# Altium PCB PCB1.PcbDoc (part 1 of 2)
Units mil, origin at the board's own origin, x right, y up, seen from the top; angles counter-clockwise.
Board outline 8130 x 4940 mil, 6 copper layers (Top Layer, TOP_GND, +5V, -5V, BOT_GND, Bottom Layer), stack 32.112 mil thick; 163 components, 155 nets, 814 pads, 428 vias.
Unrouted connection lines stored in the file: 173.
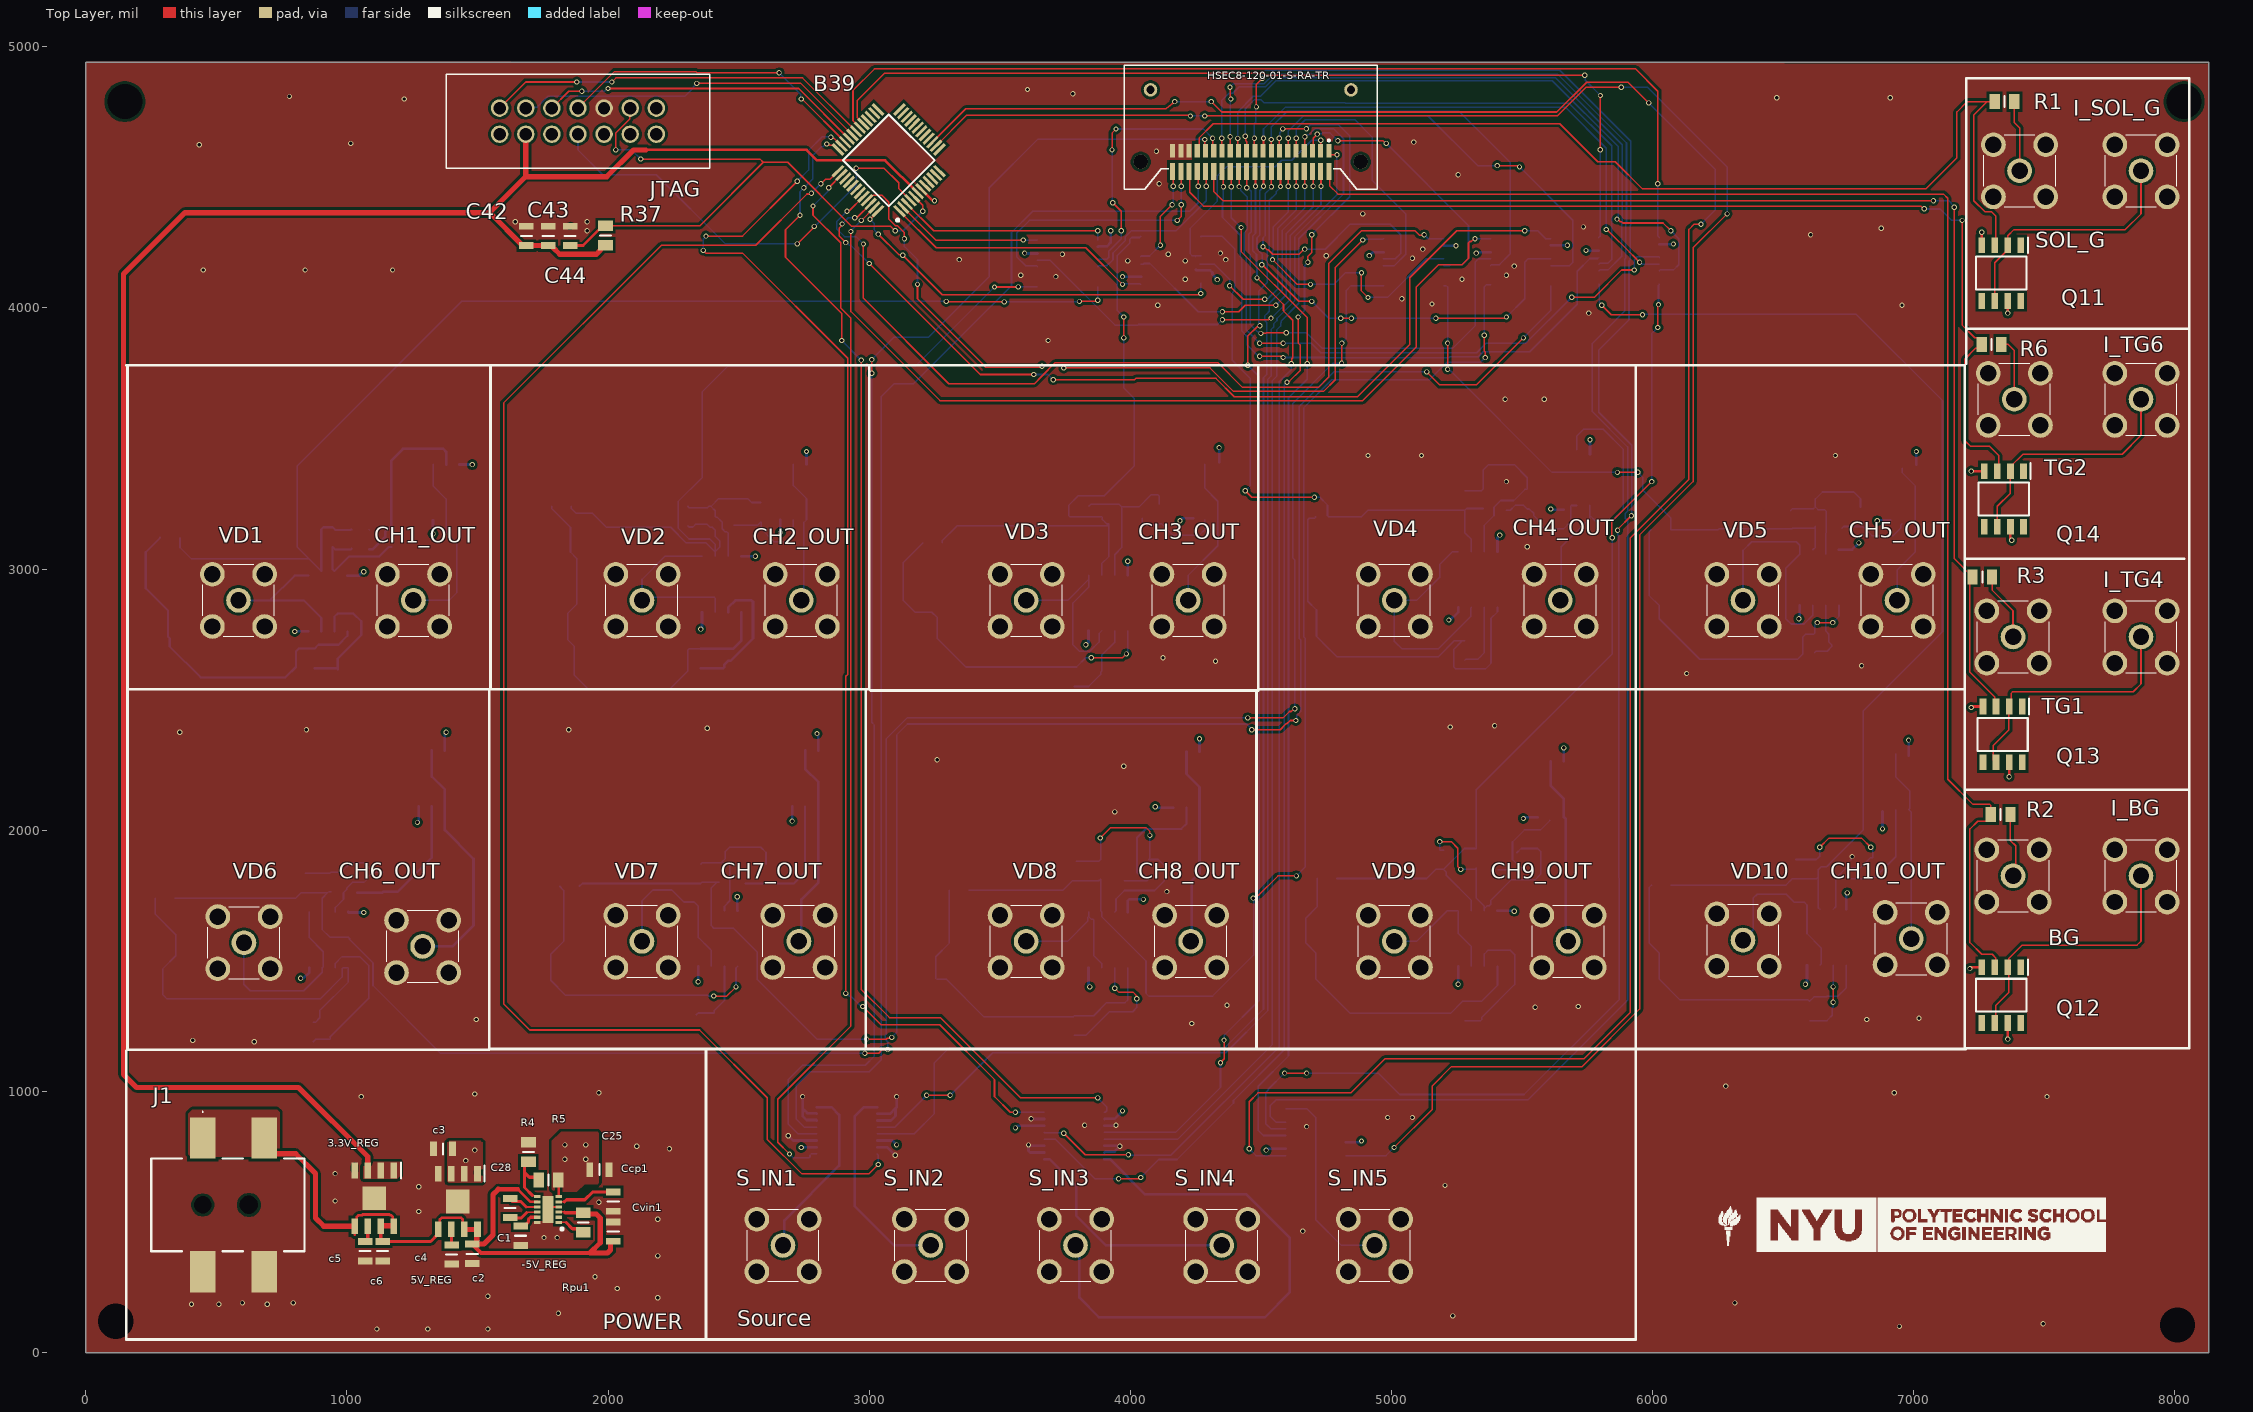
[diagram p0: Top Layer view]
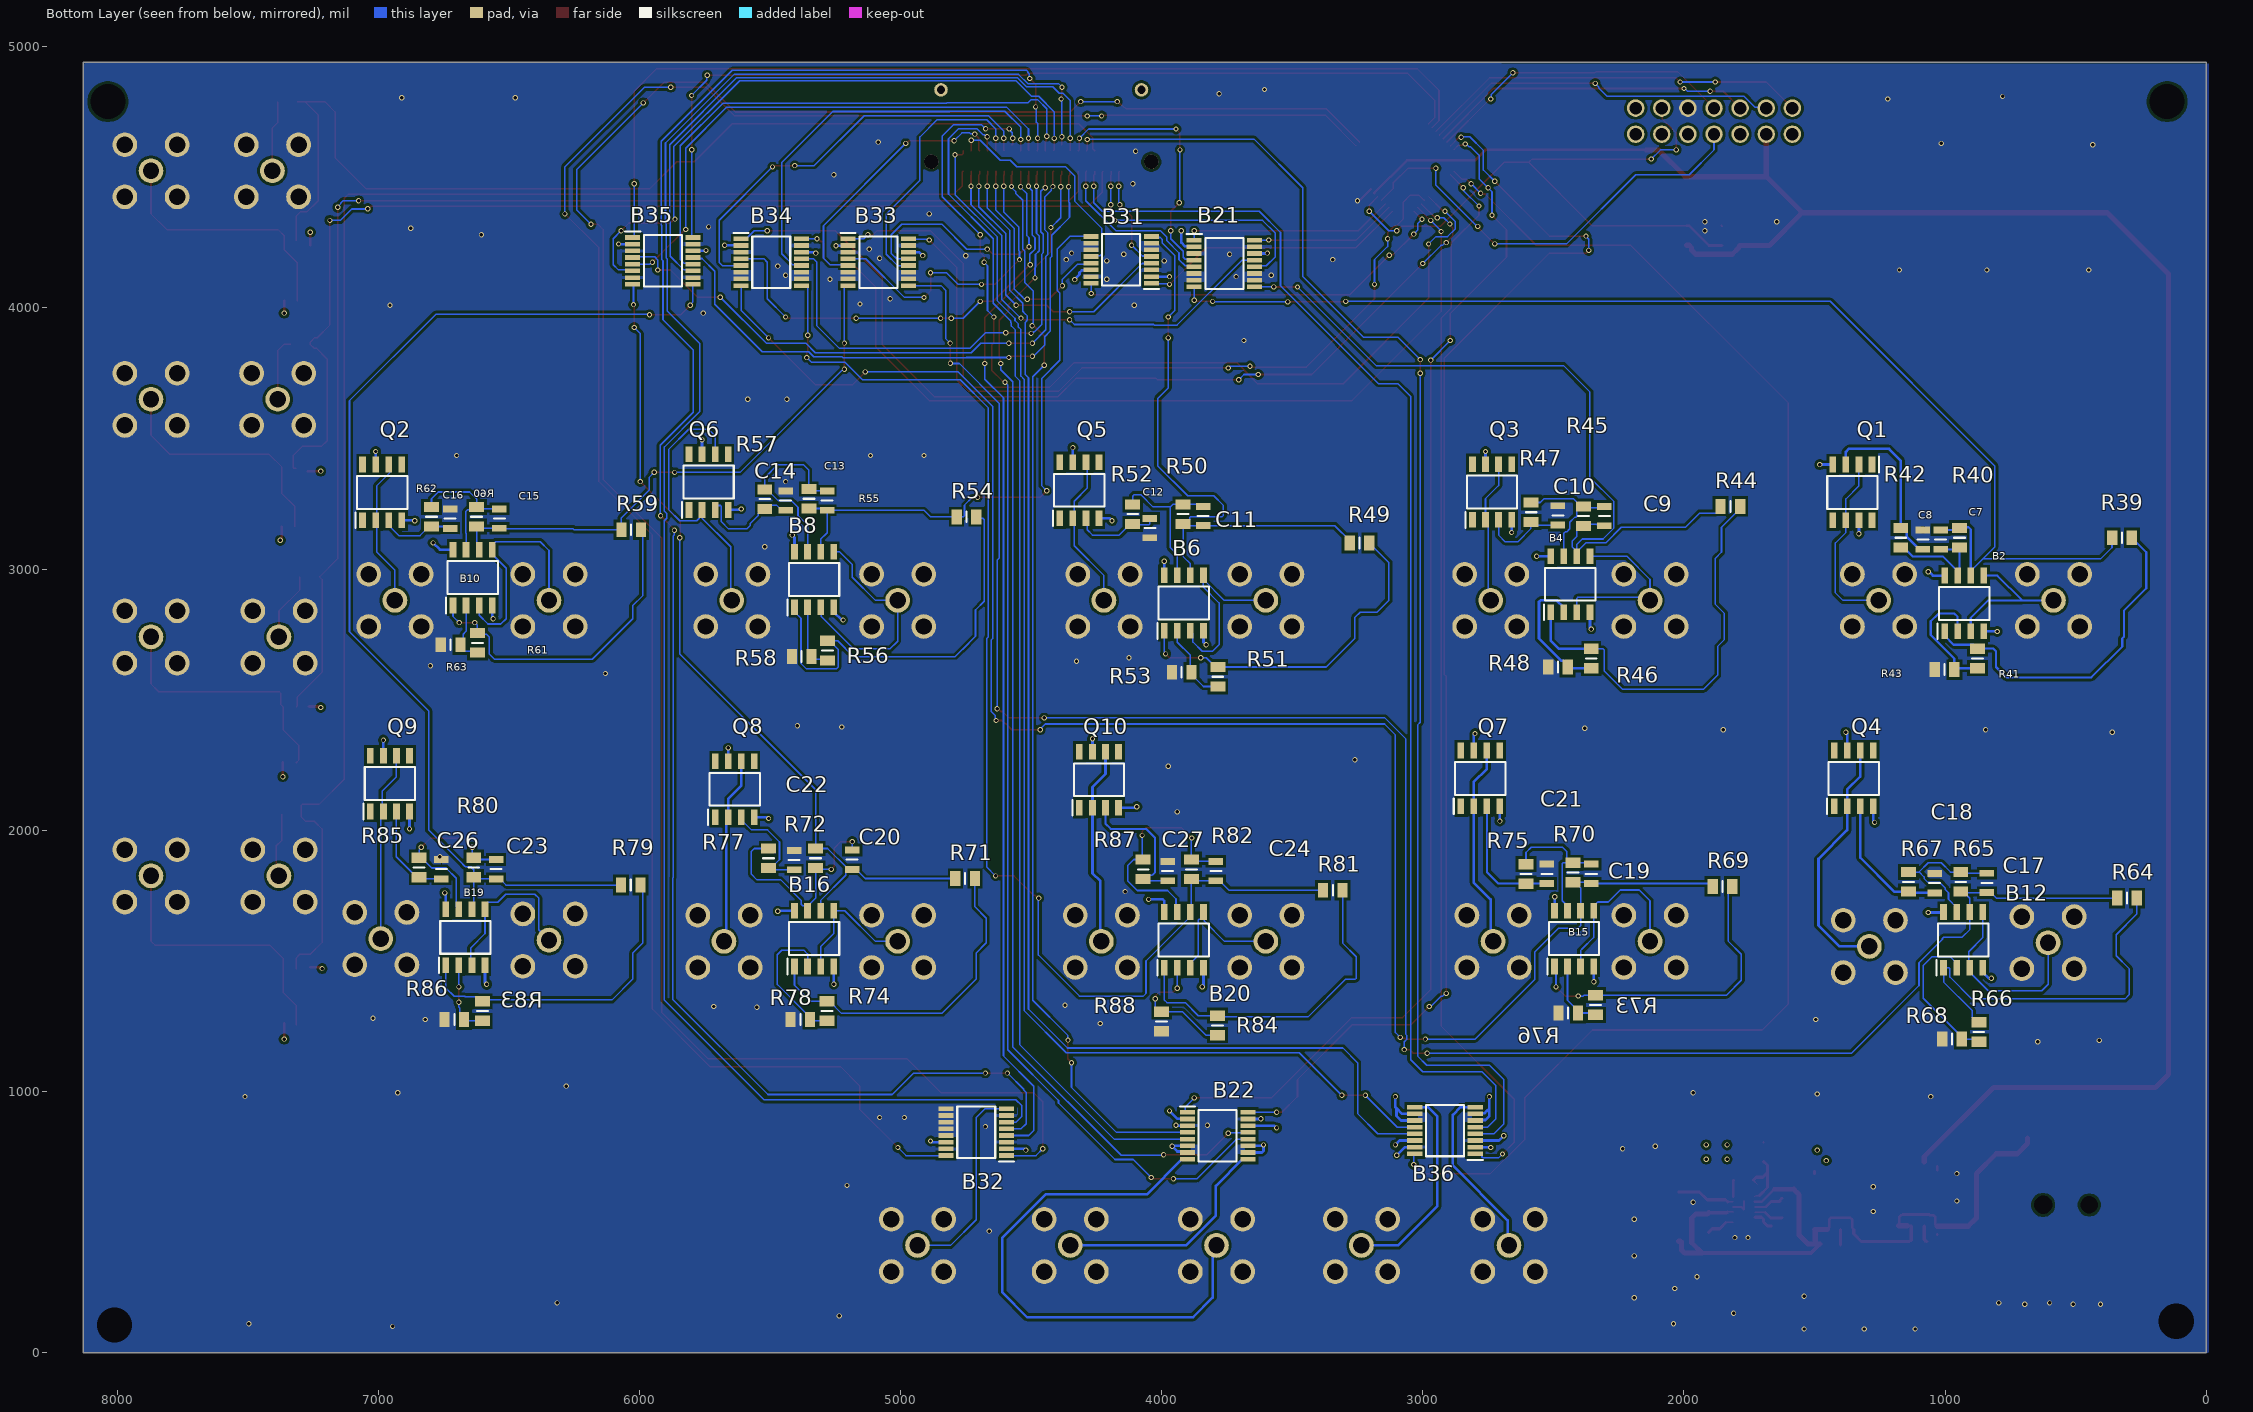
[diagram p1: Bottom Layer view, seen from below]
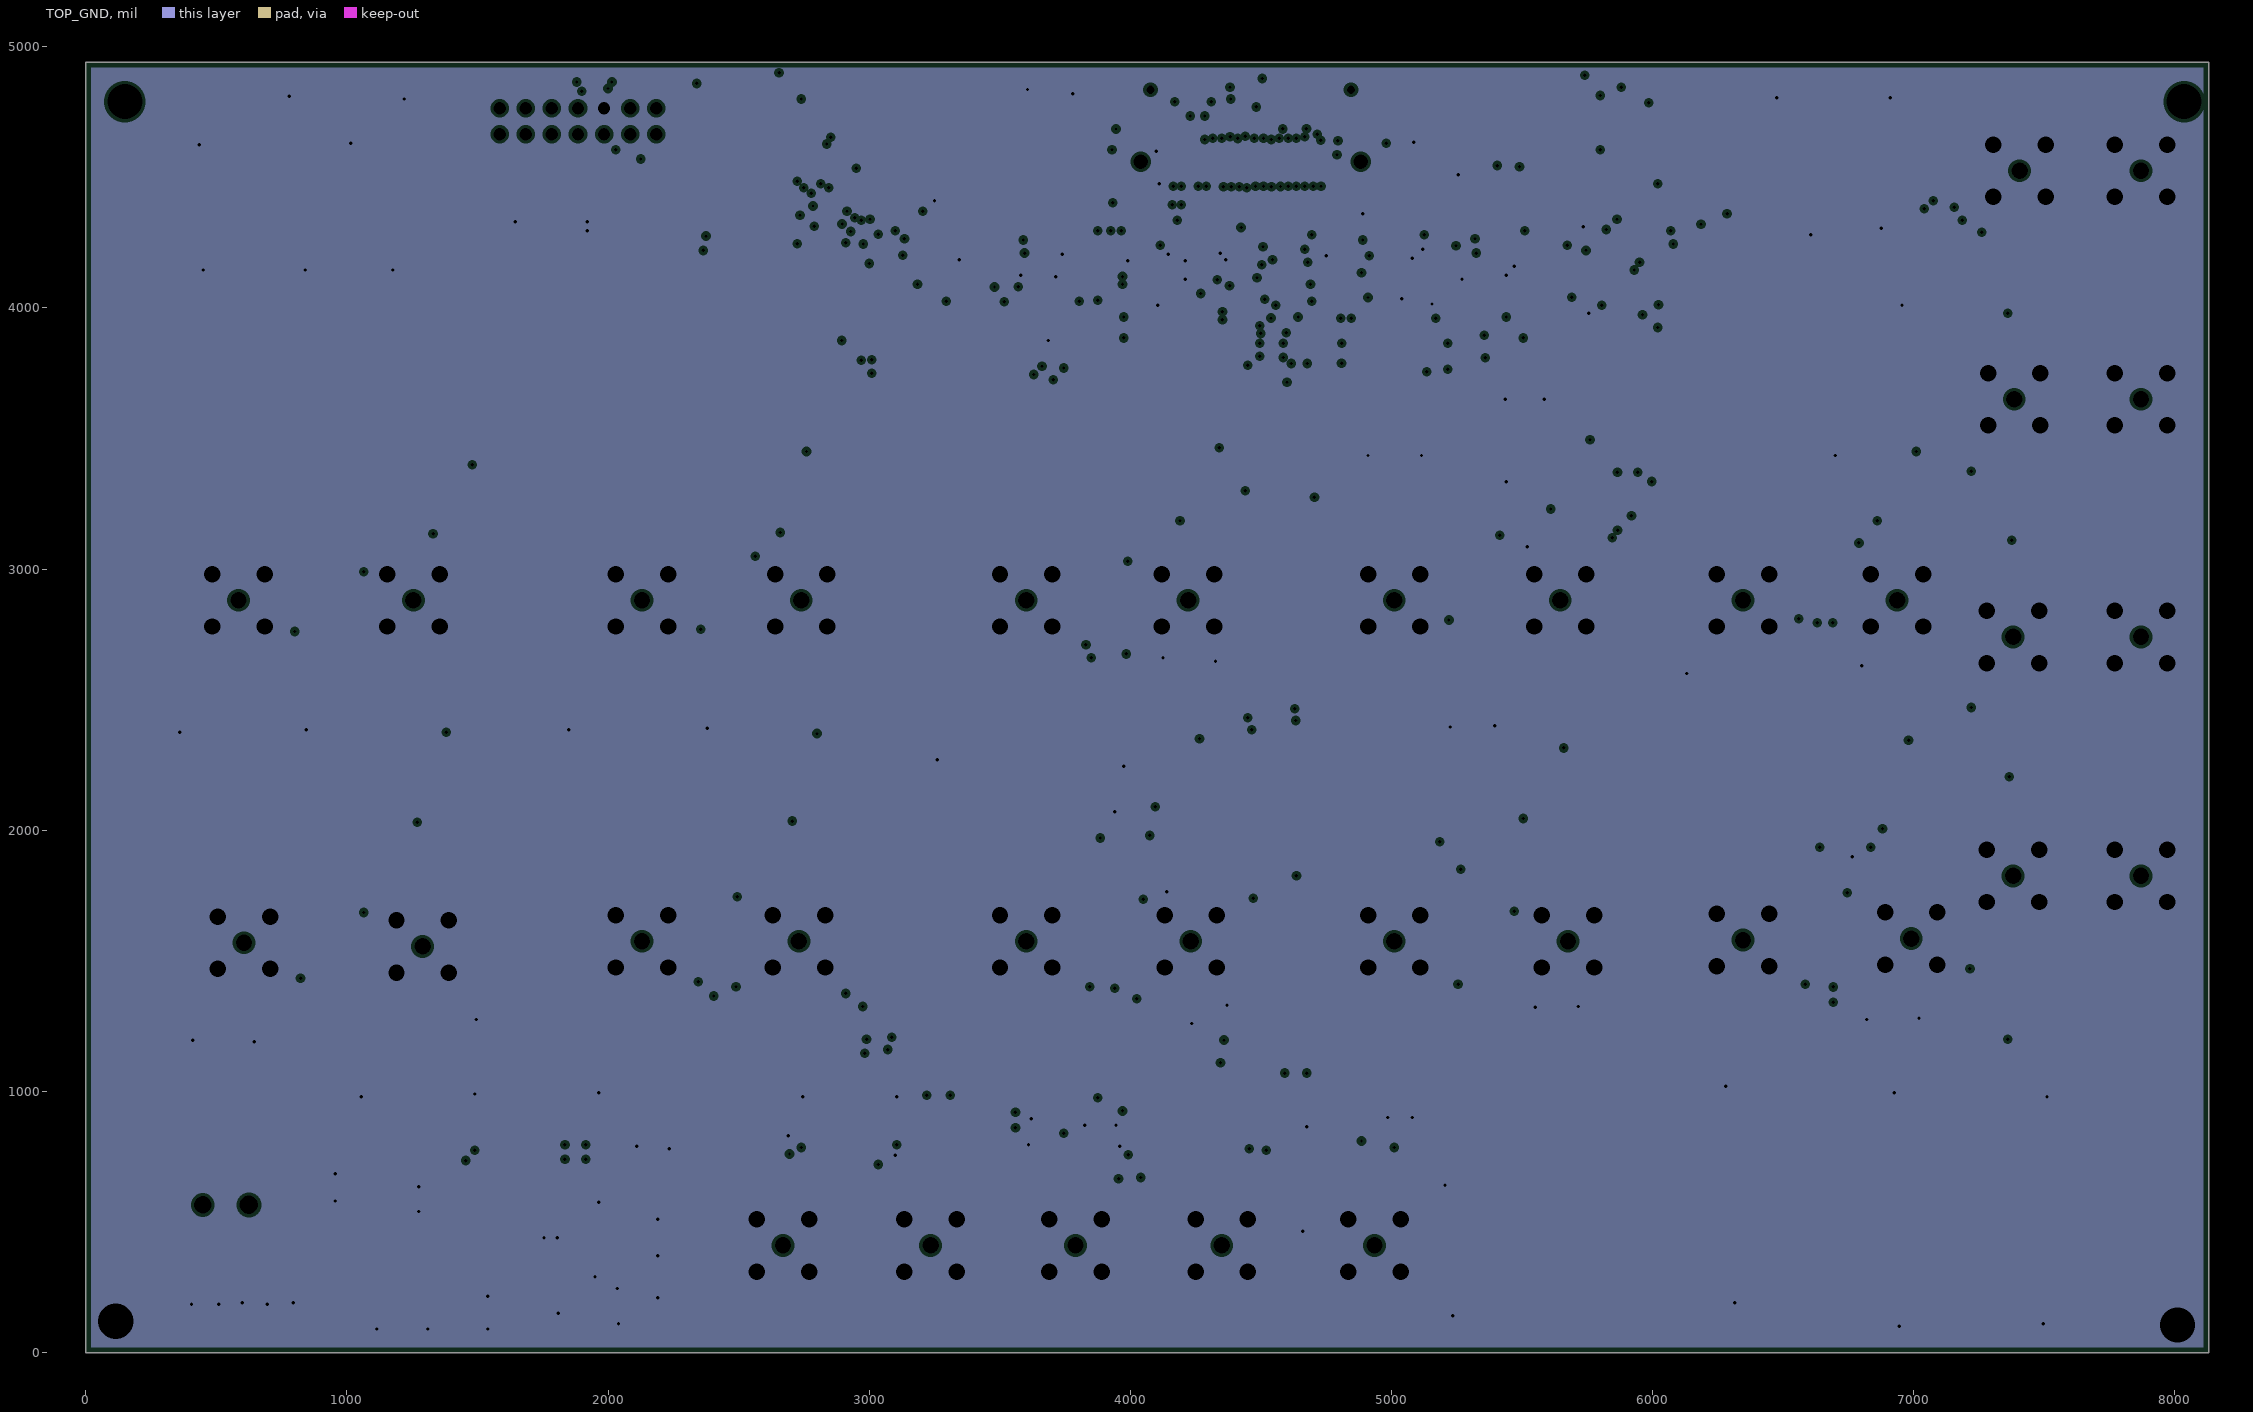
[diagram p2: TOP_GND, clearances drawn from the general rule]
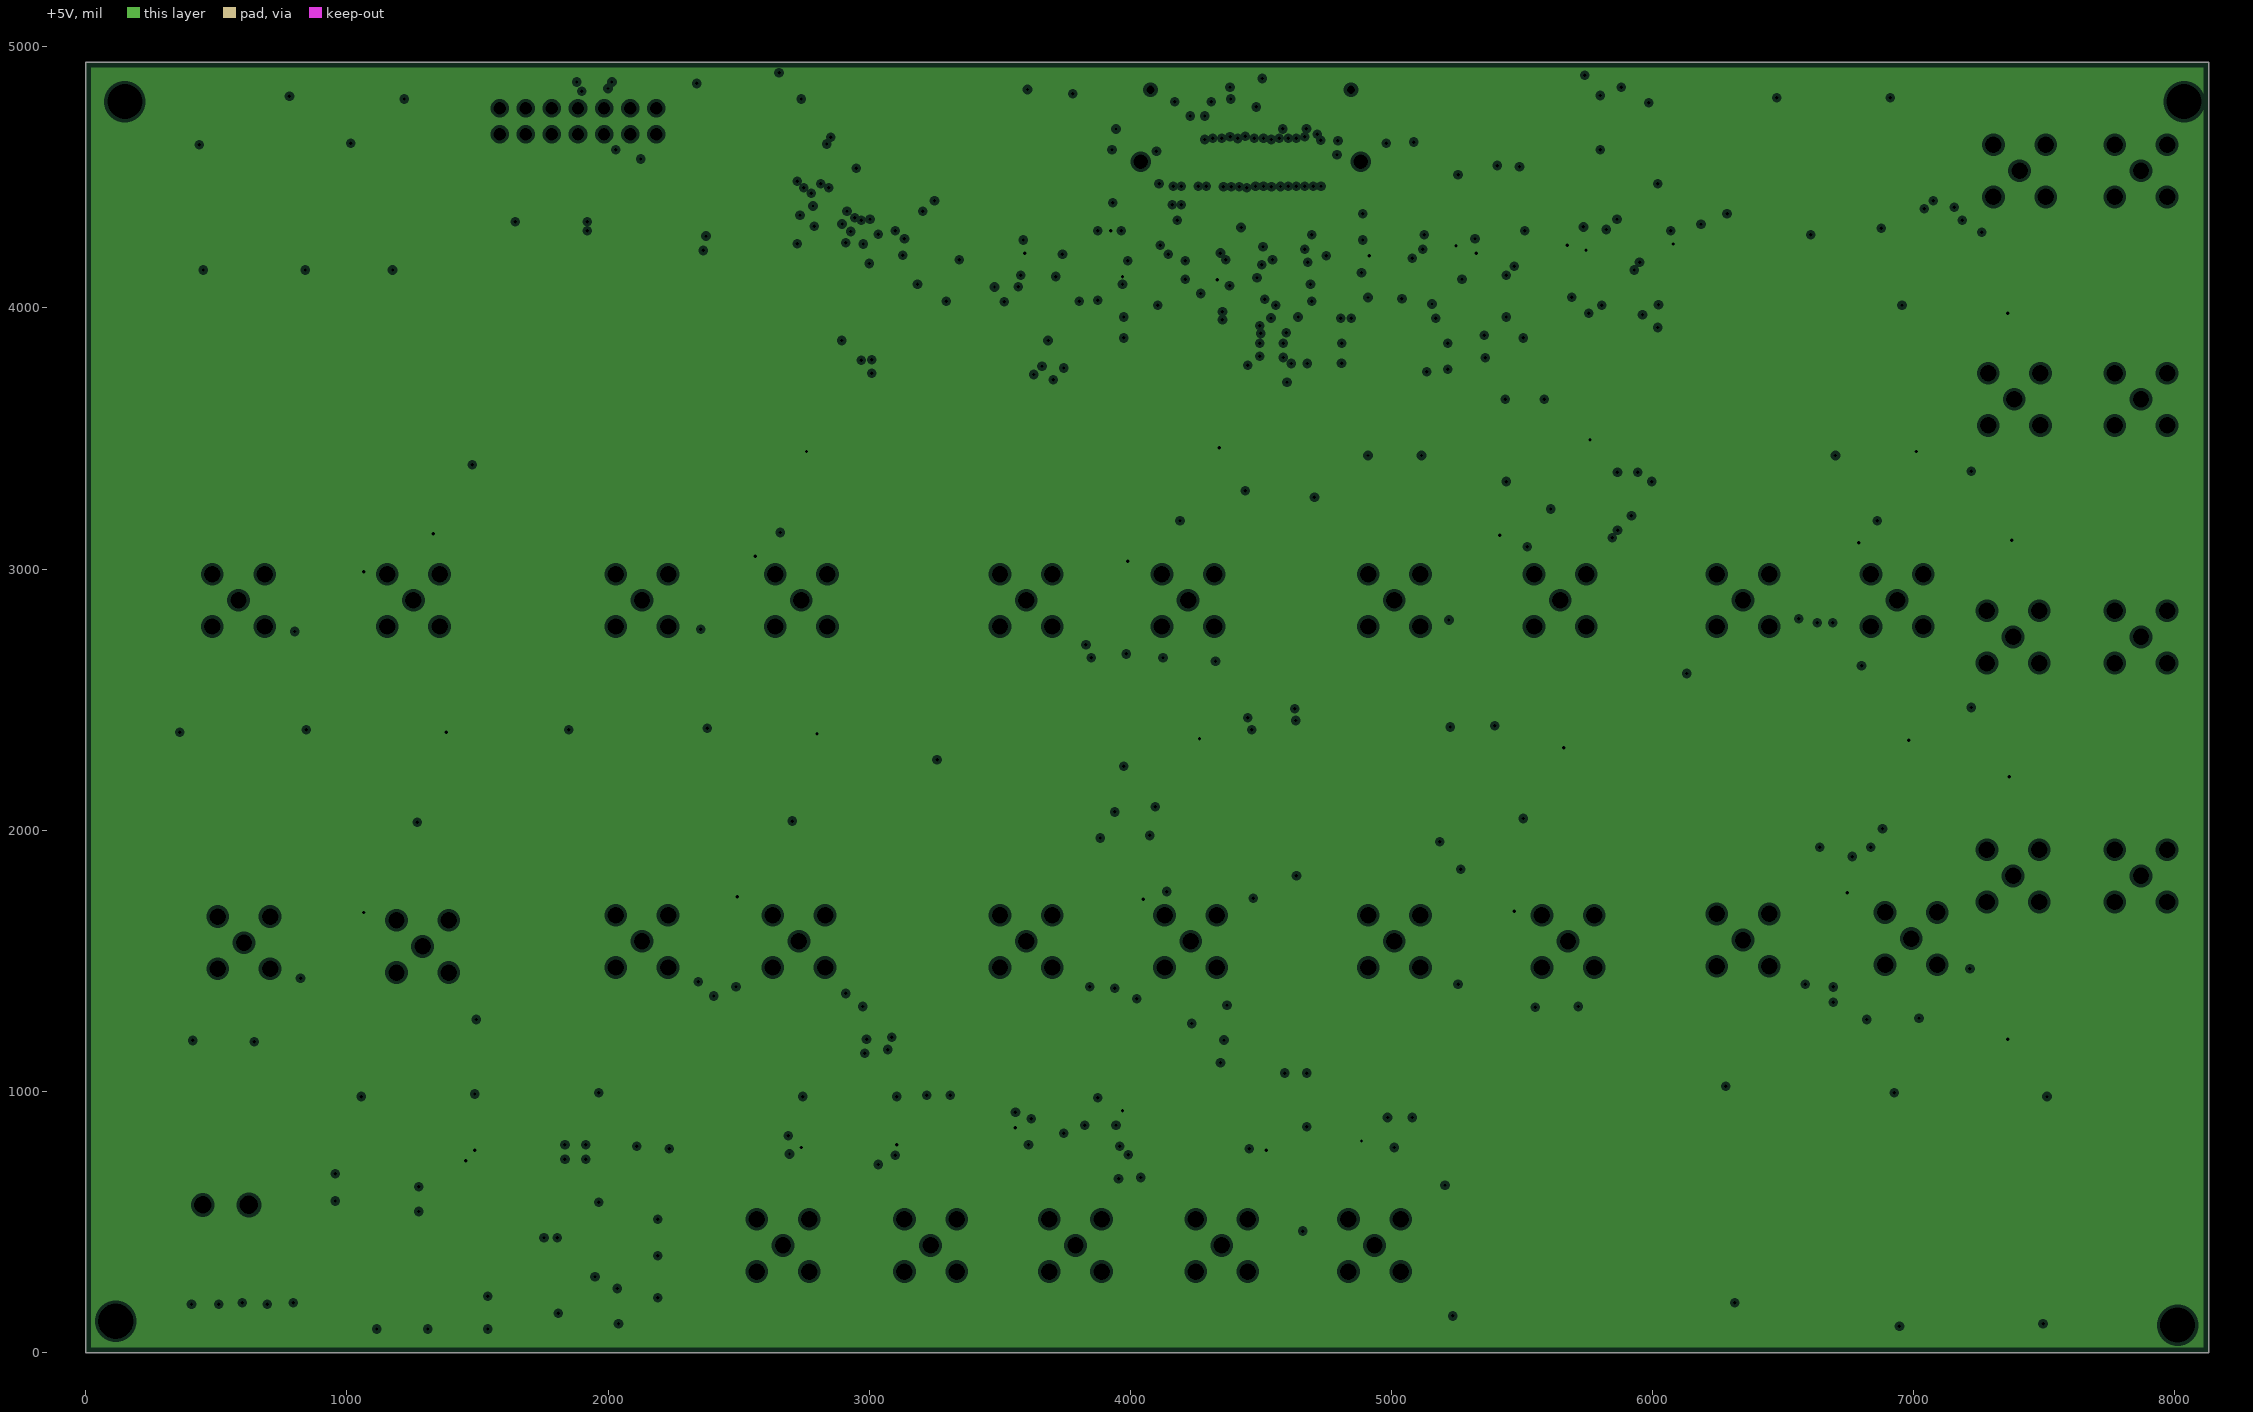
[diagram p3: +5V, clearances drawn from the general rule]
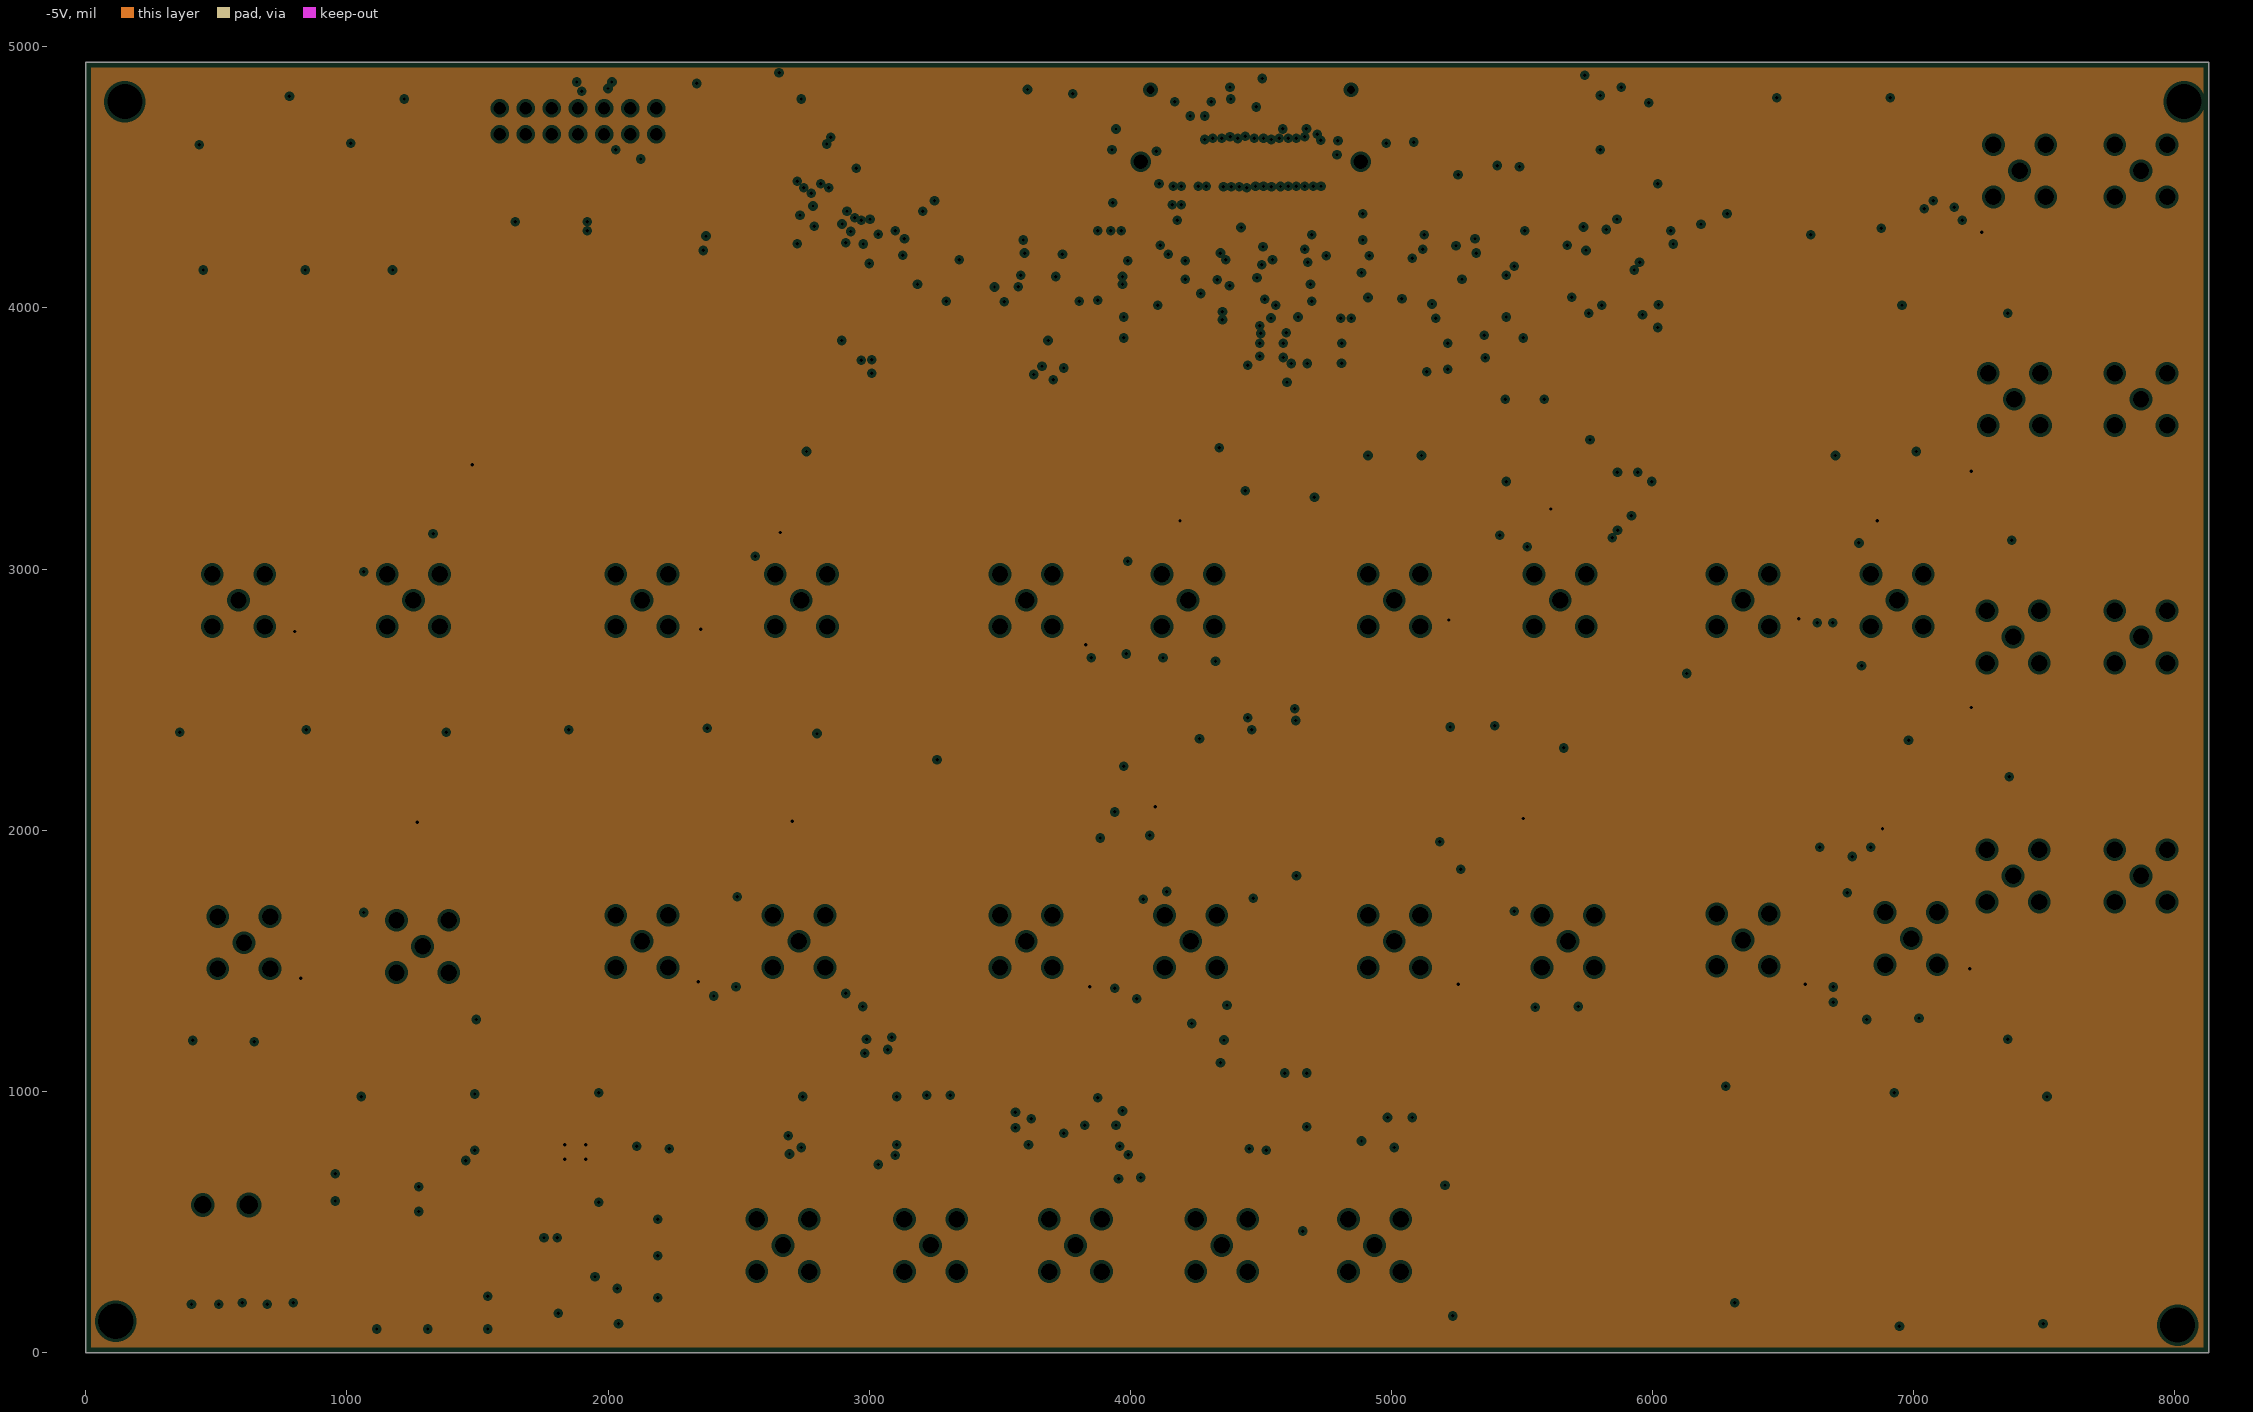
[diagram p4: -5V, clearances drawn from the general rule]
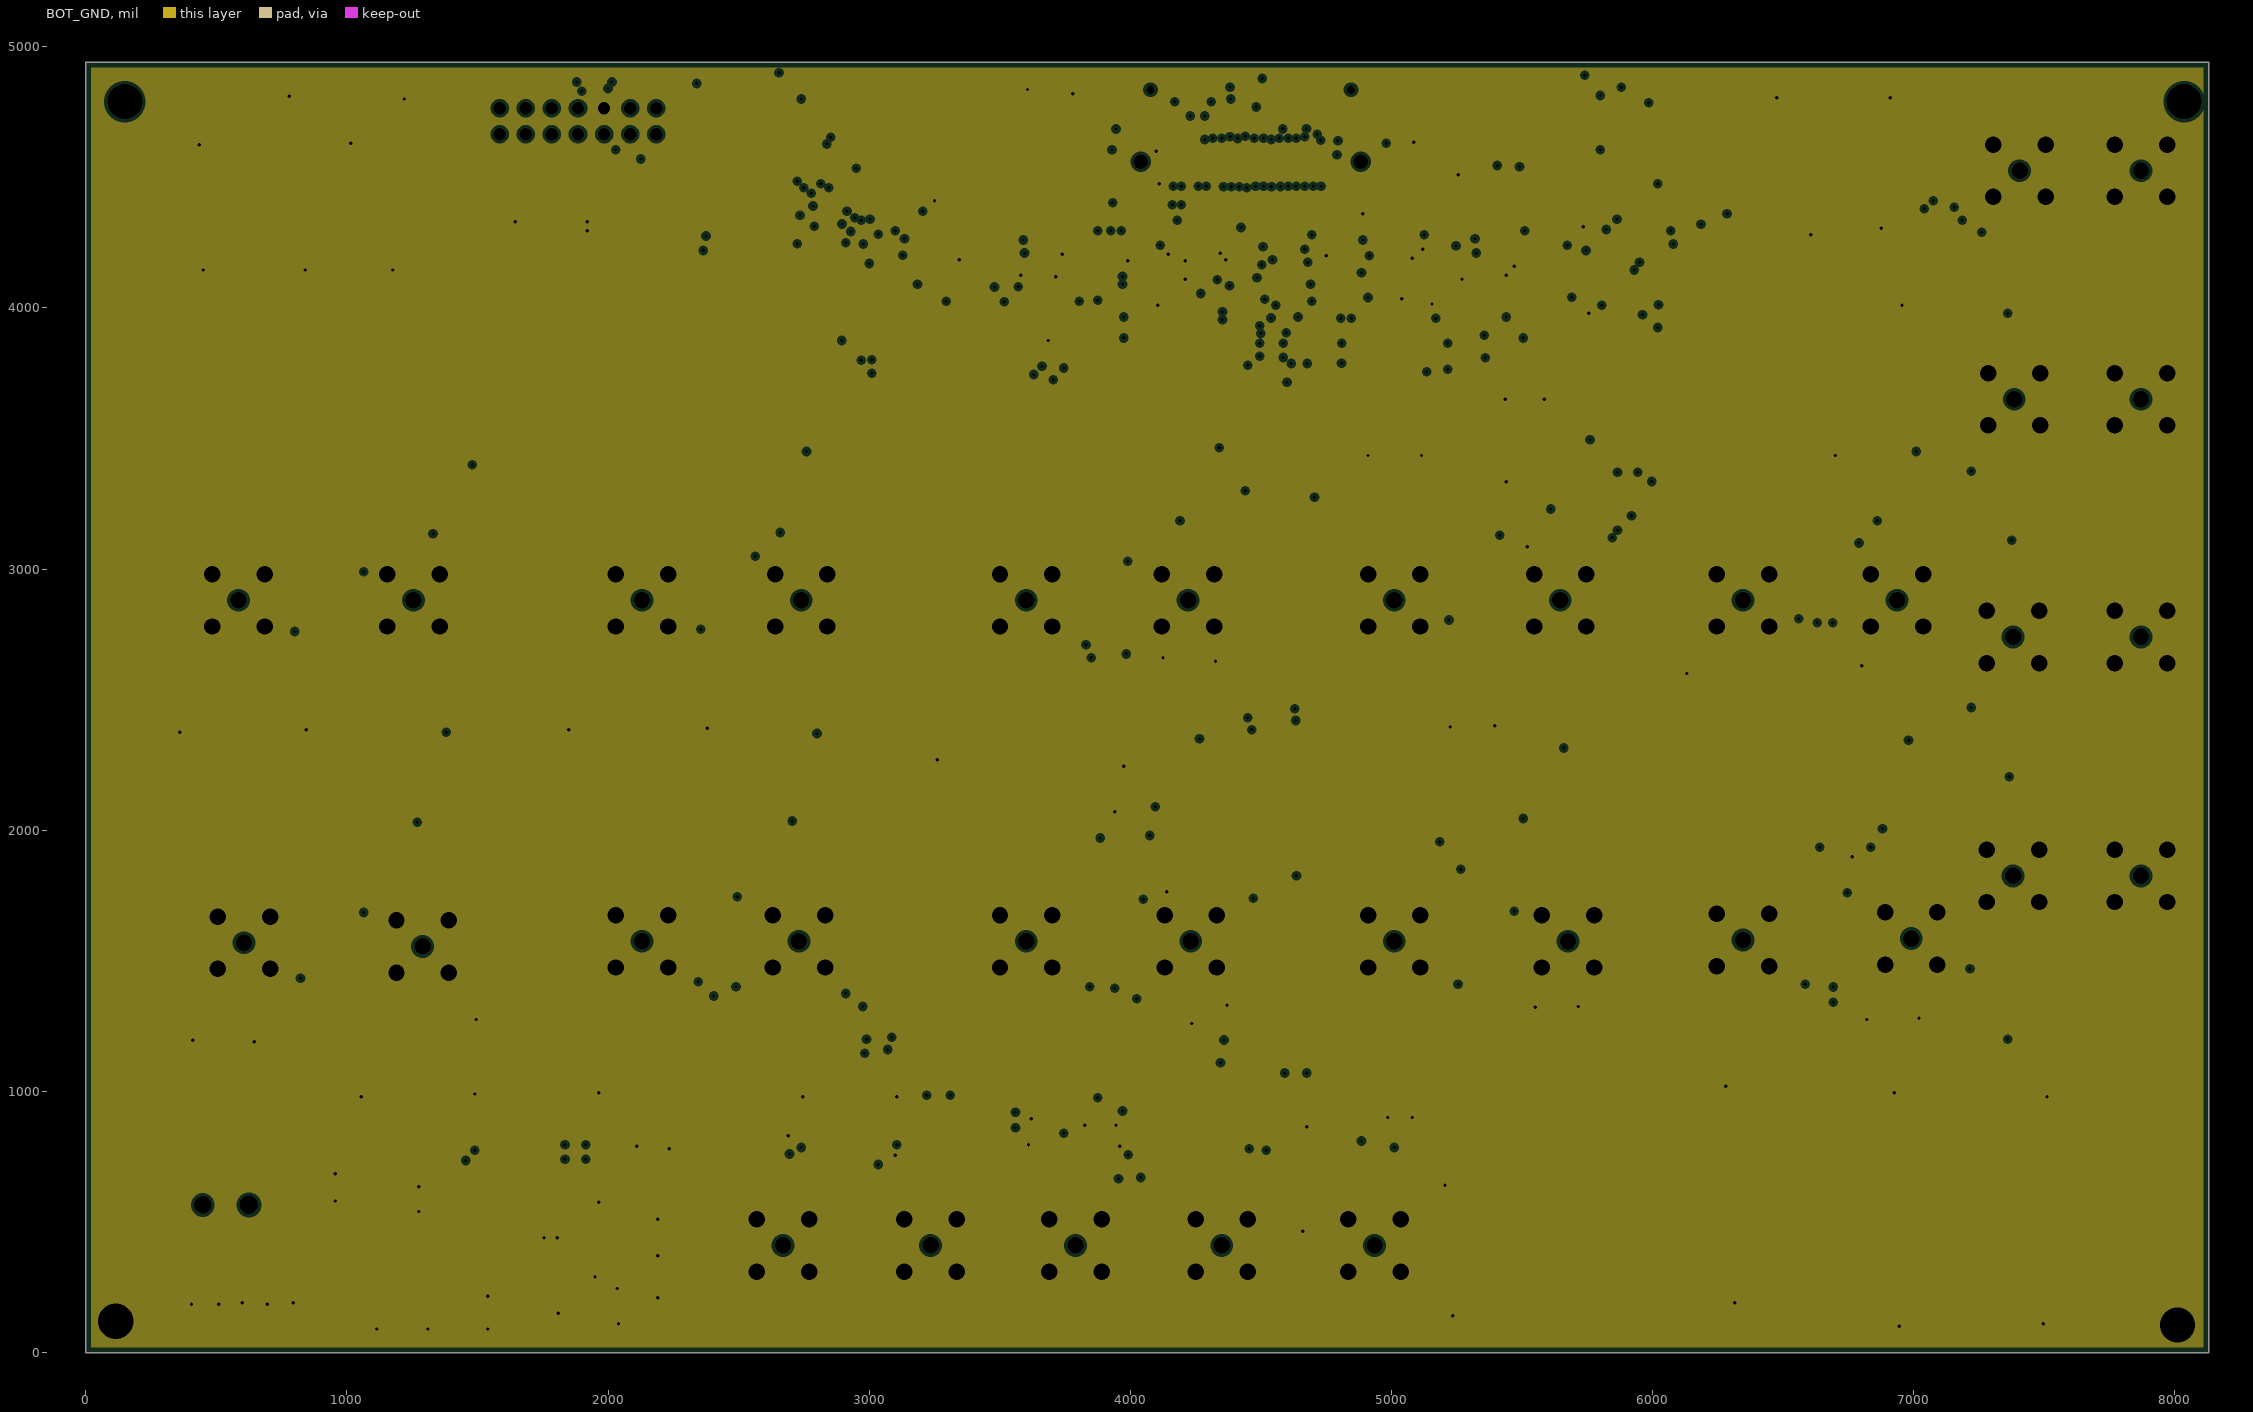
[diagram p5: BOT_GND, clearances drawn from the general rule]

## Layer stack, top to bottom
Top Solder: solder mask 0.4, Solder Resist, Dk 3.5
Top Layer: signal copper 1.4
Dielectric 4: prepreg 2.8, PP-006, Dk 4.1
TOP_GND: plane copper 1.378, net GND
Dielectric 2: prepreg 2.8, PP-006, Dk 4.1
+5V: plane copper 1.378, net +5
Dielectric 1: dielectric 12.6, FR-4, Dk 4.8
-5V: plane copper 1.378, net -5
Dielectric 3: prepreg 2.8, PP-006, Dk 4.1
BOT_GND: plane copper 1.378, net GND
Dielectric 5: prepreg 2.8, PP-006, Dk 4.1
Bottom Layer: signal copper 1.4
Bottom Solder: solder mask 0.4, Solder Resist, Dk 3.5

## Board outline
0,0 8130,0 8130,4940 0,4940

## Design rules (kind name [scope] priority, off if disabled: settings)
Clearance [All] p1: gap=10 ignorepadtopadclearanceinfootprint=TRUE except(6: Arc-Arc Arc-Track Arc-SMDPad Arc-THPad Arc-Via Arc-Text Track-Track Track-SMDPad Track-THPad Track-Via Track-Text SMDPad-SMDPad SMDPad-THPad SMDPad-Via SMDPad-Text THPad-Via THPad-Text Via-Via Via-Text Fill-Text Poly-Text Region-Text Text-Text)
HoleSize [All] p1: absolutevalues=TRUE maxlimit=200 minlimit=1 maxpercent=80.000 minpercent=20.000
MinimumSolderMaskSliver MinimumSolderMaskSliver_1 [All] p1 off: minsoldermaskwidth=2
PlaneClearance [All] p1: clearance=12
PlaneConnect [All] p1: planeconnectstyle=Relief reliefexpansion=20 reliefentries=4 reliefconductorwidth=10 reliefairgap=10
PolygonConnect [All] p1: connectstyle=Direct reliefconductorwidth=10 reliefentries=4 polygonreliefangle="90 Angle" airgapwidth=10
RoutingVias [All] p1: holewidth=10 width=20 viastyle="Through Hole" minholewidth=8 minwidth=10 maxholewidth=28 maxwidth=50
SilkToSilkClearance [All] p1: silktosilkclearance=6
SilkToSolderMaskClearance [IsPad] p1: minsilkscreentomaskgap=3 clearancetoexposedcopper=TRUE
SolderMaskExpansion [All] p1: expansion=2.5 istentingtop=FALSE useseparateexpansions=TRUE expansionbottom=2.5 istentingbottom=FALSE
Width [All] p1: maxlimit=40 minlimit=6 preferedwidth=8
24 further rules are at their usual default settings.

## Classes and differential pairs
component class MCU: B39 C42 C43 C44 R37
component class gate: BG I_BG I_SOL_G I_TG4 R1 R2 R3 TG1
component class Amplify: B2 B4 B6 B8 B10 B12 C7 C8 C9 C10 C11 C12 C13 C14 C15 C16 C17 C18 R39 R40 R41 R42 R43 R44 R45 R46 R47 R48 R49 R50 R51 R52 R53 R54 R55 R56 R57 R58 R59 R60 R61 R62 R63 R64 R65 R66 R67 R68 VD5 VD6 VD7 VD8 VD9 VD10
component class Amplify2: B15 B16 B19 B20 C19 C20 C21 C22 C23 C24 C26 C27 R69 R70 R71 R72 R73 R74 R75 R76 R77 R78 R79 R80 R81 R82 R83 R84 R85 R86 R87 R88
component class read_out: 3.3V_REG 5V_REG -5V_REG B21 B22 B31 B32 B33 B34 B35 B36 C1 c2 c3 c4 c5 c6 C25 Ccp1 CH1_OUT CH2_OUT CH3_OUT CH4_OUT CH6_OUT CH8_OUT CH9_OUT CH10_OUT Cvin1 HSEC8-120-01-S-RA-TR J1 R4 R5 Rpu1 S_IN1 S_IN2 S_IN3 S_IN4 S_IN5

## Components (designator, comment, footprint, x,y, rotation, side; value= is the part's Value field where it differs from the comment)
3.3V_REG "ADP7118ARDZ-3.3-R7" ADP7118ARDZ-5.0-R7 1560,775 r270 top
5V_REG "ADP7118ARDZ-5.0-R7" ADP7118ARDZ-5.0-R7 1880,763.23 r270 top
-5V_REG "LM27762" LM27762 1780,502.5 r180 top
B2 "ADA4610-2ARZ-R7" SOIC127P600X175-8N 926.95,2868.23 r90 bottom
B4 "ADA4610-2ARZ-R7" SOIC127P600X175-8N 2435,2941.77 r90 bottom
B6 "ADA4610-2ARZ-R7" SOIC127P600X175-8N 3915,2870 r90 bottom
B8 "ADA4610-2ARZ-R7" SOIC127P600X175-8N 5331,2960 r90 bottom
B10 "ADA4610-2ARZ-R7" SOIC127P600X175-8N 6638.5,2967.31 r90 bottom
B12 "ADA4610-2ARZ-R7" SOIC127P600X175-8N 931,1580 r90 bottom
B15 "ADA4610-2ARZ-R7" SOIC127P600X175-8N 2421,1585 r90 bottom
B16 "ADA4610-2ARZ-R7" SOIC127P600X175-8N 5331,1585 r90 bottom
B19 "ADA4610-2ARZ-R7" SOIC127P600X175-8N 6666,1590 r90 bottom
B20 "ADA4610-2ARZ-R7" SOIC127P600X175-8N 3915,1580 r90 bottom
B21 "TMUX1109PWR" TMUX1109PWR 3770,4125 r180 bottom
B22 "TMUX1109PWR" TMUX1109PWR 3795.54,785 r180 bottom
B31 "TMUX1109PWR" TMUX1109PWR 4145,4228.78 r0 bottom
B32 "TMUX1109PWR" TMUX1109PWR 4700,888.78 r0 bottom
B33 "TMUX1109PWR" TMUX1109PWR 5095,4130 r180 bottom
B34 "TMUX1109PWR" TMUX1109PWR 5505,4130 r180 bottom
B35 "TMUX1109PWR" TMUX1109PWR 5920,4135 r180 bottom
B36 "TMUX1109PWR" TMUX1109PWR 2905,895 r0 bottom
B39 "MSP430FR2355TPT" QFP50P900X900X160-48N 3075,4565 r135 top
BG "SMA-J-P-H-ST-TH1" SMAJPHSTTH1 7380,1825 r0 top
C1 "1u" 0805X7R106KT1AT -1820.34,-12646.55 r270 top
c2 "2.2u" 0805X7R106KT1AT 4925,13577.99 r90 top
c3 "2.2u" 0805X7R106KT1AT 14567.99,-2665 r0 top
c4 "2.2u" 0805X7R106KT1AT 4845.95,13575.4 r90 top
c5 "2.2u" 0805X7R106KT1AT 4515,13587.99 r90 top
c6 "2.2u" 0805X7R106KT1AT 4581.5,13587.99 r90 top
C7 "10p" 0805X7R106KT1AT 4462.6,-10087.01 r270 bottom
C8 "80n" 0805X7R106KT1AT -2360,16312.99 r90 bottom
C9 "10p" 0805X7R106KT1AT -1140,16402.99 r90 bottom
C10 "80n" 0805X7R106KT1AT -962.52,16405.51 r90 bottom
C11 "10p" 0805X7R106KT1AT 396,16403.23 r90 bottom
C12 "80n" 0805X7R106KT1AT 7490,-10042.99 r270 bottom
C13 "10p" 0805X7R106KT1AT 1836,16462.26 r90 bottom
C14 "80n" 0805X7R106KT1AT 1995,16462.01 r90 bottom
C15 "10p" 0805X7R106KT1AT 3091,16393.41 r90 bottom
C16 "80n" 0805X7R106KT1AT 3280,16392.99 r90 bottom
C17 "10p" 0805X7R106KT1AT -2605,14997.99 r90 bottom
C18 "80n" 0805X7R106KT1AT -2405,14997.01 r90 bottom
C19 "10p" 0805X7R106KT1AT -1090,15032.99 r90 bottom
C20 "10p" 0805X7R106KT1AT 1740,15087.01 r90 bottom
C21 "80n" 0805X7R106KT1AT -920,15032.99 r90 bottom
C22 "80n" 0805X7R106KT1AT 1962.81,15085.71 r90 bottom
C23 "10p" 0805X7R106KT1AT 3103.91,15050.71 r90 bottom
C24 "10p" 0805X7R106KT1AT 347.76,15043.41 r90 bottom
C25 "2.2u" 0805X7R106KT1AT 15167.01,-2745 r0 top
C26 "80n" 0805X7R106KT1AT 3313.14,15050.71 r90 bottom
C27 "80n" 0805X7R106KT1AT 532.56,15043.41 r90 bottom
C28 "1u" 0805X7R106KT1AT 5110,13647.01 r90 top
C42 "100n" 0805X7R106KT1AT 5132.53,17475.8 r90 top
C43 "10u" 0805X7R106KT1AT 5216.04,17475.8 r90 top
C44 "1n" 0805X7R106KT1AT 5299.55,17475.8 r90 top
Ccp1 "4.7uf" 0805X7R106KT1AT 5465,13777.99 r90 top
CH1_OUT "SMA-J-P-H-ST-TH1" SMAJPHSTTH1 1255,2880 r0 top
CH2_OUT "SMA-J-P-H-ST-TH1" SMAJPHSTTH1 2740,2880 r0 top
CH3_OUT "SMA-J-P-H-ST-TH1" SMAJPHSTTH1 4221,2880 r0 top
CH4_OUT "SMA-J-P-H-ST-TH1" SMAJPHSTTH1 5646,2880 r0 top
CH5_OUT "SMA-J-P-H-ST-TH1" SMAJPHSTTH1 6936,2880 r90 top
CH6_OUT "SMA-J-P-H-ST-TH1" SMAJPHSTTH1 1290,1555 r0 top
CH7_OUT "SMA-J-P-H-ST-TH1" SMAJPHSTTH1 2731,1574.29 r0 top
CH8_OUT "SMA-J-P-H-ST-TH1" SMAJPHSTTH1 4231,1574.29 r0 top
CH9_OUT "SMA-J-P-H-ST-TH1" SMAJPHSTTH1 5676,1574.29 r0 top
CH10_OUT "SMA-J-P-H-ST-TH1" SMAJPHSTTH1 6990,1585 r0 top
Cvin1 "2.2u" 0805X7R106KT1AT -1425,-12737.01 r270 top
HSEC8-120-01-S-RA-TR "HSEC8-120-01-S-RA-TR" SAMTEC_HSEC8-120-01-L-RA 4461.14,4562.36 r180 top
I_BG "SMA-J-P-H-ST-TH1" SMAJPHSTTH1 7870,1825 r0 top
I_SOL_G "SMA-J-P-H-ST-TH1" SMAJPHSTTH1 7870,4525 r0 top
I_TG4 "SMA-J-P-H-ST-TH1" SMAJPHSTTH1 7870,2740 r0 top
I_TG6 "SMA-J-P-H-ST-TH1" SMAJPHSTTH1 7870,3650 r0 top
J1 "PJ-002AH-SMT-TR" PWRPJ 589.29,485 r270 top
JTAG "302-S14" CONN_7024614xx_MOL 2185,4765 r180 top
Q1 "AD8510ARZ" AD8510ARZ 365,-2596.46 r270 bottom
Q2 "AD8510ARZ" AD8510ARZ 7975,9183.23 r90 bottom
Q3 "AD8510ARZ" AD8510ARZ 3725,9185 r90 bottom
Q4 "AD8510ARZ" AD8510ARZ 2340,8088.23 r90 bottom
Q5 "AD8510ARZ" AD8510ARZ 5305,9191.77 r90 bottom
Q6 "AD8510ARZ" AD8510ARZ 6725,9223.23 r90 bottom
Q7 "AD8510ARZ" AD8510ARZ 3770,8088.23 r90 bottom
Q8 "AD8510ARZ" AD8510ARZ 6625,8046.77 r90 bottom
Q9 "AD8510ARZ" AD8510ARZ 7945,8068.23 r90 bottom
Q10 "AD8510ARZ" AD8510ARZ 5230,8083.23 r90 bottom
Q11 "AD8510ARZ" AD8510ARZ 8325,-1756.77 r270 top
Q12 "AD8510ARZ" AD8510ARZ 8325,-4521.77 r270 top
Q13 "AD8510ARZ" AD8510ARZ 8330,-3523.23 r270 top
Q14 "AD8510ARZ" AD8510ARZ 8335,-2621.77 r270 top
R1 "100M" CR0805-FX-1543ELF 5287.4,6250 r180 top
R2 "100M" CR0805-FX-1543ELF 5272.6,3520 r180 top
R3 "100M" CR0805-FX-1543ELF 5202.4,4430 r180 top
R4 "100k" CR0805-FX-1543ELF 3155,2827.6 r90 top
R5 "309k" CR0805-FX-1543ELF 3832.4,-800 r0 top
R6 "100M" CR0805-FX-1543ELF 5237.6,5320 r180 top
R37 "47k" CR0805-FX-1543ELF 3450,6337.6 r90 top
R39 "110k" CR0805-FX-1543ELF 2382.6,4580 r0 bottom
R40 "110k" CR0805-FX-1543ELF 2405,1059.88 r270 bottom
R41 "110k" CR0805-FX-1543ELF -584.05,4717.6 r90 bottom
R42 "10k" CR0805-FX-1543ELF -290,5179.88 r90 bottom
R43 "110k" CR0805-FX-1543ELF -1057.6,1155 r180 bottom
R44 "110k" CR0805-FX-1543ELF 3882.4,4700 r0 bottom
R45 "110k" CR0805-FX-1543ELF 925,5262.4 r90 bottom
R46 "110k" CR0805-FX-1543ELF 895,4717.6 r90 bottom
R47 "10k" CR0805-FX-1543ELF 4045,1157.4 r270 bottom
R48 "110k" CR0805-FX-1543ELF 422.6,1165 r180 bottom
R49 "110k" CR0805-FX-1543ELF 5302.4,4560 r0 bottom
R50 "110k" CR0805-FX-1543ELF 2458.19,5270.12 r90 bottom
R51 "110k" CR0805-FX-1543ELF 2325,4647.6 r90 bottom
R52 "10k" CR0805-FX-1543ELF 5571,1150.12 r270 bottom
R53 "110k" CR0805-FX-1543ELF 1863.4,1145 r180 bottom
R54 "110k" CR0805-FX-1543ELF 6807.6,4660 r0 bottom
R55 "110k" CR0805-FX-1543ELF 3891,5329.15 r90 bottom
R56 "110k" CR0805-FX-1543ELF 3820,4747.6 r90 bottom
R57 "10k" CR0805-FX-1543ELF 6980,1207.4 r270 bottom
R58 "110k" CR0805-FX-1543ELF 3318.4,1205 r180 bottom
R59 "110k" CR0805-FX-1543ELF 8091.29,4610.32 r0 bottom
R60 "110k" CR0805-FX-1543ELF 5163.19,5260.3 r90 bottom
R61 "110k" CR0805-FX-1543ELF 5160,4777.6 r90 bottom
R62 "10k" CR0805-FX-1543ELF 8256,1140.3 r270 bottom
R63 "110k" CR0805-FX-1543ELF 4662.6,1250 r180 bottom
R64 "110k" CR0805-FX-1543ELF 2363.6,3200 r0 bottom
R65 "110k" CR0805-FX-1543ELF -520,3862.4 r90 bottom
R66 "110k" CR0805-FX-1543ELF -589,3287.6 r90 bottom
R67 "10k" CR0805-FX-1543ELF 2600,-257.6 r270 bottom
R68 "110k" CR0805-FX-1543ELF -1086.4,-260 r180 bottom
R69 "110k" CR0805-FX-1543ELF 3912.6,3245 r0 bottom
R70 "110k" CR0805-FX-1543ELF 965,3897.6 r90 bottom
R71 "110k" CR0805-FX-1543ELF 6812.6,3275 r0 bottom
R72 "110k" CR0805-FX-1543ELF 6785,-167.4 r270 bottom
R73 "110k" CR0805-FX-1543ELF 878.17,3390.64 r90 bottom
R74 "110k" CR0805-FX-1543ELF 3821,3367.4 r90 bottom
R75 "10k" CR0805-FX-1543ELF 4065,-227.4 r270 bottom
R76 "110k" CR0805-FX-1543ELF 383.4,-160 r180 bottom
R77 "10k" CR0805-FX-1543ELF 6965,-167.4 r270 bottom
R78 "110k" CR0805-FX-1543ELF 3323.6,-185 r180 bottom
R79 "110k" CR0805-FX-1543ELF 8092.94,3250 r0 bottom
R80 "110k" CR0805-FX-1543ELF 5174.31,3917.6 r90 bottom
R81 "110k" CR0805-FX-1543ELF 5404.72,3230 r0 bottom
R82 "110k" CR0805-FX-1543ELF 2425.94,3910.3 r90 bottom
R83 "110k" CR0805-FX-1543ELF 5141,3367.6 r90 bottom
R84 "110k" CR0805-FX-1543ELF 2326,3312.4 r90 bottom
R85 "10k" CR0805-FX-1543ELF 8303.54,-202.4 r270 bottom
R86 "110k" CR0805-FX-1543ELF 4648.6,-185 r180 bottom
R87 "10k" CR0805-FX-1543ELF 5530.75,-209.7 r270 bottom
R88 "110k" CR0805-FX-1543ELF 2540,3327.6 r90 bottom
Rpu1 "10k" CR0805-FX-1543ELF 445,-1562.4 r270 top
S_IN1 "SMA-J-P-H-ST-TH1" SMAJPHSTTH1 2670,410 r0 top
S_IN2 "SMA-J-P-H-ST-TH1" SMAJPHSTTH1 3235,410 r0 top
S_IN3 "SMA-J-P-H-ST-TH1" SMAJPHSTTH1 3790,410 r0 top
S_IN4 "SMA-J-P-H-ST-TH1" SMAJPHSTTH1 4350,410 r0 top
S_IN5 "SMA-J-P-H-ST-TH1" SMAJPHSTTH1 4935,410 r0 top
SOL_G "SMA-J-P-H-ST-TH1" SMAJPHSTTH1 7405,4525 r0 top
TG1 "SMA-J-P-H-ST-TH1" SMAJPHSTTH1 7380,2740 r0 top
TG2 "SMA-J-P-H-ST-TH1" SMAJPHSTTH1 7385,3650 r0 top
VD1 "SMA-J-P-H-ST-TH1" SMAJPHSTTH1 585,2880 r0 top
VD2 "SMA-J-P-H-ST-TH1" SMAJPHSTTH1 2130,2880 r0 top
VD3 "SMA-J-P-H-ST-TH1" SMAJPHSTTH1 3601,2880 r0 top
VD4 "SMA-J-P-H-ST-TH1" SMAJPHSTTH1 5011,2880 r0 top
VD5 "SMA-J-P-H-ST-TH1" SMAJPHSTTH1 6346,2880 r180 top
VD6 "SMA-J-P-H-ST-TH1" SMAJPHSTTH1 606,1569.29 r0 top
VD7 "SMA-J-P-H-ST-TH1" SMAJPHSTTH1 2130,1574.29 r0 top
VD8 "SMA-J-P-H-ST-TH1" SMAJPHSTTH1 3601,1574.29 r0 top
VD9 "SMA-J-P-H-ST-TH1" SMAJPHSTTH1 5011,1574.29 r0 top
VD10 "SMA-J-P-H-ST-TH1" SMAJPHSTTH1 6346,1579.29 r0 top

## Footprints (in the part's own frame and the unit in brackets; to place one, negate y for a bottom-side part, rotate by r counter-clockwise, add the part's x,y. Pads: shape width x height; smd on the part's side, far side on the other; paste and mask are expansions set on the pad)
0805X7R106KT1AT [mm]
  rect 0.67x1.41 smd: 1(-336.22,87.503) 2(-334.34,87.503)
  silkscreen extent -335.28,86.97 -335.28,88.04, body extent -336.28,86.87 -334.28,88.14, height 1.13
AD8510ARZ [mm]
  rect 1.525x0.65 smd: 1(-152.318,-23.241) 2(-152.318,-24.511) 3(-152.318,-25.781) 4(-152.318,-27.051) 5(-146.894,-27.051) 6(-146.894,-25.781) 7(-146.894,-24.511) 8(-146.894,-23.241)
  silkscreen extent -153.08,-27.6 -148.01,-22.57, body extent -152.73,-27.6 -146.73,-22.7, height 1.75
ADP7118ARDZ-5.0-R7 [mm]
  rect 1.525x0.65 smd: 1(1.987,-9.652) 2(1.987,-10.922) 3(1.987,-12.192) 4(1.987,-13.462) 5(7.411,-13.462) 6(7.411,-12.192) 7(7.411,-10.922) 8(7.411,-9.652)
  rect 2.29x2.29 smd: 9(4.699,-11.557)
  silkscreen extent 1.22,-8.98 2.75,-8.98, body extent 1.7,-13.97 7.7,-9.07, height 0.85
CONN_7024614xx_MOL [mil]
  round 67 / inner round 60 / far side round 67 hole 47 paste-33.5 mask+0: 1(0,0) 2(0,100) 3(100,0) 4(100,100) 5(200,0) 6(200,100) 7(300,0) 8(300,100) 9(400,0) 10(400,100) 11(500,0) 12(500,100) 13(600,0) 14(600,100)
  silkscreen extent -205,-130 805,230, body extent -205,-125 795,225, height 280
CR0805-FX-1543ELF [mm]
  rect 1x1.45 smd: 1(-53.274,37.084) 2(-51.374,37.084)
  silkscreen extent -52.32,36.56 -52.32,37.61, body extent -53.32,36.46 -51.32,37.71, height 0.6
LM27762 [mm]
  rect 0.65x0.3 smd: 1(-0.796,0.107) 2(-0.796,-0.393) 3(-0.796,-0.893) 4(-0.796,-1.393) 5(-0.796,-1.893) 6(-0.796,-2.393) 7(1.304,-2.393) 8(1.304,-1.893) 9(1.304,-1.393) 10(1.304,-0.893) 11(1.304,-0.393) 12(1.304,0.107)
  rect 1.1x2.66 smd: 13(0.254,-1.143)
  silkscreen extent -1.25,0.63 -1,0.88, body extent -0.8,-2.64 1.3,0.36, height 0.8
PWRPJ [mm]
  rect 4x2.5 smd: 1(-8.532,-3.593) 2(4.468,-3.593) 3(4.468,2.407) A1(-8.532,2.407)
  round 0.85 hole 1.7 unplated: MH1(-2.032,-3.593)
  round 0.9 hole 1.8 unplated: MH2(-2.032,0.907)
  silkscreen extent -11.13,-8.59 2.47,6.31, body extent -8.26,-8.49 4.34,6.41, height 10.98
QFP50P900X900X160-48N [mm]
  rect 1.475x0.3 smd: 1(-4.238,2.75) 2(-4.238,2.25) 3(-4.238,1.75) 4(-4.238,1.25) 5(-4.238,0.75) 6(-4.238,0.25) 7(-4.238,-0.25) 8(-4.238,-0.75) 9(-4.238,-1.25) 10(-4.238,-1.75) 11(-4.238,-2.25) 12(-4.238,-2.75) 25(4.238,-2.75) 26(4.238,-2.25) 27(4.238,-1.75) 28(4.238,-1.25) 29(4.238,-0.75) 30(4.238,-0.25) 31(4.238,0.25) 32(4.238,0.75) 33(4.238,1.25) 34(4.238,1.75) 35(4.238,2.25) 36(4.238,2.75)
  rect 0.3x1.475 smd: 13(-2.75,-4.238) 14(-2.25,-4.238) 15(-1.75,-4.238) 16(-1.25,-4.238) 17(-0.75,-4.238) 18(-0.25,-4.238) 19(0.25,-4.238) 20(0.75,-4.238) 21(1.25,-4.238) 22(1.75,-4.238) 23(2.25,-4.238) 24(2.75,-4.238) 37(2.75,4.238) 38(2.25,4.238) 39(1.75,4.238) 40(1.25,4.238) 41(0.75,4.238) 42(0.25,4.238) 43(-0.25,4.238) 44(-0.75,4.238) 45(-1.25,4.238) 46(-1.75,4.238) 47(-2.25,4.238) 48(-2.75,4.238)
  silkscreen extent -4.85,-3.15 3.15,3.62, body extent -4.5,-4.5 4.5,4.5, height 1.6
SAMTEC_HSEC8-120-01-L-RA [mm]
  rect 0.5x1.35 smd: 1(-7.6,-1) 3(-6.8,-1) 5(-6,-1) 7(-5.2,-1) 9(-4.4,-1) 11(-3.6,-1) 13(-2.8,-1) 15(-2,-1) 17(-1.2,-1) 19(-0.4,-1) 21(0.4,-1) 23(1.2,-1) 25(2,-1) 27(2.8,-1) 29(3.6,-1) 31(4.4,-1) 33(5.2,-1) 35(6,-1) 37(6.8,-1) 39(7.6,-1)
  rect 0.5x1.65 smd: 2(-7.6,1) 4(-6.8,1) 6(-6,1) 8(-5.2,1) 10(-4.4,1) 12(-3.6,1) 14(-2.8,1) 16(-2,1) 18(-1.2,1) 20(-0.4,1) 22(0.4,1) 24(1.2,1) 26(2,1) 28(2.8,1) 30(3.6,1) 32(4.4,1) 34(5.2,1) 36(6,1) 38(6.8,1) 40(7.6,1)
  round 1.318 hole 0.81: P1(-9.75,-6.925) P2(9.75,-6.925)
  round 1.4 hole 1.4 unplated: ""(-10.7,0.075) ""(10.7,0.075)
  silkscreen extent -12.3,-9.3 12.3,2.75, body extent -12.3,-9.32 12.3,2.73, height 5.15
SMAJPHSTTH1 [mm]
  round 2.4 hole 1.6: 1(0,0) 2(-2.54,2.54) 3(-2.54,-2.54) 4(2.54,-2.54) 5(2.54,2.54)
  silkscreen extent -3.5,-3.5 3.5,3.5, body extent -3.44,-3.5 3.56,3.5, height 9.55
SOIC127P600X175-8N [mm]
  rect 1.525x0.65 smd: 1(-2.712,1.905) 2(-2.712,0.635) 3(-2.712,-0.635) 4(-2.712,-1.905) 5(2.712,-1.905) 6(2.712,-0.635) 7(2.712,0.635) 8(2.712,1.905)
  silkscreen extent -3.47,-2.45 1.6,2.58, body extent -3,-2.45 3,2.45, height 1.75
TMUX1109PWR [mm]
  rect 1.475x0.45 smd: 1(-2.684,3.418) 2(-2.684,2.768) 3(-2.684,2.118) 4(-2.684,1.468) 5(-2.684,0.818) 6(-2.684,0.168) 7(-2.684,-0.482) 8(-2.684,-1.132) 9(3.192,-1.132) 10(3.192,-0.482) 11(3.192,0.168) 12(3.192,0.818) 13(3.192,1.468) 14(3.192,2.118) 15(3.192,2.768) 16(3.192,3.418)
  silkscreen extent -3.42,-1.36 2.1,3.99, body extent -2.95,-1.36 3.45,3.64, height 1.13

## Part data
3.3V_REG: library part ADP7118ARDZ-5.0-R7
B2 B4 B6 B8 B10 B12 B15 B16 B19 B20: "Low Noise, Precision, Rail-to-Rail Output, JFET Dual Op Amp +/-5 V to +/-15 V 40C to +125C", Manufacturer_Name="Analog Devices", Mouser Part Number=584-ADA4610-2ARZ-R7, Datasheet Link=https://www.analog.com/ADA4610-2/datasheet, Geometry.Height=1.75mm, Manufacturer_Part_Number=ADA4610-2ARZ-R7, Mouser Price/Stock=https://www.mouser.co.uk/ProductDetail/Analog-Devices/ADA4610-2ARZ-R7?qs=BpaRKvA4VqEBfMREioRxEg%3D%3D
B39: "16-bit Microcontrollers - MCU 24MHz 105C ULP Microcontroller With 32 KB FRAM, 4 KB SRAM, 44 IO, 12-bit ADC, 12-bit DACs, OpAmp/PGA 48-LQFP -40 to 105", Manufacturer_Name="Texas Instruments", Mouser Part Number=595-MSP430FR2355TPT, Datasheet Link=https://datasheet.datasheetarchive.com/originals/distributors/DKDS41/DSANUWW0029426.pdf, Geometry.Height=1.6mm, Manufacturer_Part_Number=MSP430FR2355TPT, Mouser Price/Stock=https://www.mouser.co.uk/ProductDetail/Texas-Instruments/MSP430FR2355TPT?qs=gTYE2QTfZfTjQOKK%2F%2Fw59A%3D%3D
BG CH1_OUT CH2_OUT CH3_OUT CH4_OUT CH5_OUT CH6_OUT CH7_OUT CH8_OUT CH9_OUT CH10_OUT I_BG I_SOL_G I_TG4 I_TG6 S_IN1 S_IN2 S_IN3 S_IN4 S_IN5 SOL_G TG1 TG2 VD1 VD2 VD3 VD4 VD5 VD6 VD7 VD8 VD9 VD10: "SAMTEC - SMA-J-P-H-ST-TH1 - RF COAXIAL, SMA JACK, 50 OHM, PCB", Manufacturer_Name=SAMTEC, Mouser Part Number=200-SMAJPHSTTH1, Datasheet Link=http://suddendocs.samtec.com/prints/sma-j-p-x-st-th1-mkt.pdf, Geometry.Height=9.55mm, Manufacturer_Part_Number=SMA-J-P-H-ST-TH1, Mouser Price/Stock=https://www.mouser.co.uk/ProductDetail/Samtec/SMA-J-P-H-ST-TH1?qs=bkXRl3BLxbHdaAB2Qwy6zw%3D%3D
C1 c2 c3 c4 c5 c6 C7 C8 C9 C10 C11 C12 C13 C14 C15 C16 C17 C18 C19 C20 C21 C22 C23 C24 C25 C26 C27 C28 C42 C43 C44 Ccp1: library part capacitor
Cvin1: library part 0805X7R106KT1AT
J1: library part Powerinput
JTAG: library part JTAG
R1 R2 R3 R4 R5 R6 R37 R39 R40 R41 R42 R43 R44 R45 R46 R47 R48 R49 R50 R51 R52 R53 R54 R55 R56 R57 R58 R59 R60 R61 R62 R63 R64 R65 R66 R67 R68 R69 R70 R71 R72 R73 R74 R75 R76 R77 R78 R79 R80 R81 R82 R83 R84 R85 R86 R87 R88 Rpu1: library part resistor

## Free pads (board coordinates)
  round 0 hole 135: 1(150,4790) 2(8035,4790) 3(8010,105)
  round 0 hole 135 paste+0 mask+2.5: ""(115,120)

## Via types
v1: diameter 20, hole 13, Top Layer to Bottom Layer, tented both sides, 428 vias

## Nets (pads, with @x,y where several pads share a name; then routed paths per layer and width w, separated by ;. In a path a pad name is that pad's centre, name@x,y a point inside that pad or via, vN(x,y) a via of type N, cw(c..) or ccw(c..) an arc to the next point about the centre after c; other vN are vias at no path point)
+5: 5V_REG.1 5V_REG.2 5V_REG.3 B2.8 B4.8 B6.8 B8.8 B10.8 B12.8 B15.8 B16.8 B19.8 B20.8 B21.2 B21.14 B22.2 B22.14 B31.2 B31.14 B32.2 B32.14 B33.2 B33.14 B34.2 B34.14 B35.2 B35.14 B36.2 B36.14 c3.2 Q1.7 Q2.7 Q3.7 Q4.7 Q5.7 Q6.7 Q7.7 Q8.7 Q9.7 Q10.7 Q11.7 Q12.7 Q13.7 Q14.7 | length 2587.5
  Top Layer w10: 5V_REG.1@1500,685 5V_REG.1@1500,693.54 ; v1(7360,1200) Q12.7@7360,1261.46 ; v1(7360,3980) Q11.7@7360,4026.46 ; v1(7365,2205) Q13.7@7365,2260 ; Q14.7@7370,3161.46 7370,3115 v1(7375,3110)
  Bottom Layer w10: B2.8@1001.95,2975 1047.29,2975 1062.29,2990 v1(1065,2990) ; B12.8@1006,1686.77 1007.77,1685 v1(1065,1685) ; v1(1330,3135) Q1.7@1330,3186.77 ; Q4.7@1375,2305 1375,2370 v1(1380,2375) ; v1(2495,1745) 2495.5,1744.5 2495.5,1692.27 B15.8@2496,1691.77 ; B4.8@2510,3048.54 2563.54,3048.54 v1@2565,3050 ; v1(2740,785) 2741.02,786.02 B36.2@2799.33,786.02 ; Q3.7@2760,3401.77 v1(2760,3450) ; v1(2800,2370) 2805,2365 Q7.7@2805,2305 ; B36.14@3030.67,811.61 3088.39,811.61 v1(3105,795) ; v1(3560,860) 3561.35,860 3569.74,868.39 B22.14@3669.87,868.39 ; v1(3595,4210) 3596.61,4208.39 B21.14@3644.33,4208.39 ; B21.2@3875.67,4233.98 3877.4,4235.71 3910.92,4235.71 3925,4249.79 v1(3925,4295) ; B22.2@3901.21,893.98 3901.62,894.39 3939.39,894.39 v1(3970,925) ; v1(3970,4120) B31.2@4041.39,4120 ; B20.8@3990,1686.77 3990,1729.14 3995.86,1735 v1(4050,1735) ; B6.8@3990,2976.77 v1(3990,3030) ; B31.14@4251.5,4145.39 4253.23,4143.66 4305.92,4143.66 4314.7,4134.87 4314.7,4128.11 4333.23,4109.59 v1(4333.23,4108.23) ; Q10.7@4265,2300 v1(4265,2350) ; Q5.7@4340,3408.54 v1(4340,3465) ; v1(4520,775) 4524.8,779.8 B32.2@4594.33,779.8 ; B32.14@4825.67,805.39 4880.39,805.39 v1(4885,810) ; v1(4915.09,4200.16) 4928.31,4213.39 B33.14@4969.33,4213.39 ; B33.2@5200.67,4238.98 5201.28,4238.37 5246.63,4238.37 v1(5247.24,4237.76) ; v1(5325,4210) 5326.35,4210 5329.74,4213.39 B34.14@5379.33,4213.39 ; B16.8@5406,1691.77 5468.23,1691.77 v1(5470,1690) ; B8.8@5406,3066.77 5406,3121 v1@5410,3125 ; B34.2@5610.67,4238.98 5610.93,4239.23 5673.24,4239.23 v1(5673.5,4239.49) ; Q8.7@5660,2263.54 v1(5660,2315) ; v1(5745,4220) 5746.61,4218.39 B35.14@5794.33,4218.39 ; Q6.7@5760,3440 v1(5760,3495) ; B35.2@6025.67,4243.98 6025.93,4244.24 6079.24,4244.24 v1(6079.5,4244.5) ; B10.8@6713.5,3074.08 6764.08,3074.08 v1(6790,3100) ; B19.8@6741,1696.77 6741,1754.38 6745,1758.38 v1(6745,1760) ; Q9.7@6980,2285 v1(6980,2345) ; Q2.7@7010,3400 v1(7010,3450)
  other v1: 1455,735 1490,775 2564.27,3049.27 5415,3130
-5: -5V_REG.6 B2.4 B4.4 B6.4 B8.4 B10.4 B12.4 B15.4 B16.4 B19.4 B20.4 C25.1 Q1.4 Q2.4 Q3.4 Q4.4 Q5.4 Q6.4 Q7.4 Q8.4 Q9.4 Q10.4 Q11.4 Q12.4 Q13.4 Q14.4 R5.2 | length 1460.2
  Top Layer w10: R5.2@1809.8,660 1811.34,658.46 -5V_REG.6@1811.34,596.71 ; v1(7215,1470) 7220,1475 Q12.4@7260,1475 ; v1(7220,2470) 7223.54,2473.54 Q13.4@7265,2473.54 ; v1(7220,3375) Q14.4@7270,3375 ; Q11.4@7260,4240 v1(7260,4290)
  Bottom Layer w10: v1@800,2760 801.46,2761.46 B2.4@851.95,2761.46 ; v1(822.73,1433.34) 833.34,1433.34 856,1456 B12.4@856,1473.22 ; v1(1270,2030) 1275,2035 Q4.4@1275,2091.46 ; Q1.4@1430,3400.32 1479.68,3400.32 v1(1480,3400) ; v1(2345,1420) 2345.5,1420.5 2345.5,1477.72 B15.4@2346,1478.22 ; v1(2355,2770) 2360,2775 B4.4@2360,2835 ; v1(2660,3140) Q3.4@2660,3188.23 ; v1(2705,2035) Q7.4@2705,2091.46 ; v1(3830,2710) 3840,2720 B6.4@3840,2763.23 ; B20.4@3840,1473.23 3840,1405 v1(3845,1400) ; v1(4095,2090) 4098.54,2086.46 Q10.4@4165,2086.46 ; v1(4190,3185) 4200,3195 Q5.4@4240,3195 ; v1(5220,2805) 5225,2805 5256,2836 B8.4@5256,2853.23 ; v1(5255,1410) 5256,1411 B16.4@5256,1478.22 ; v1(5505,2045) 5510,2050 Q8.4@5560,2050 ; v1(5610,3230) 5613.54,3226.46 Q6.4@5660,3226.46 ; v1(6560,2810) 6563.5,2813.5 B10.4@6563.5,2860.54 ; v1(6585,1410) 6591,1416 B19.4@6591,1483.22 ; v1(6860,3185) 6861.46,3186.46 Q2.4@6910,3186.46 ; v1(6880,2005) Q9.4@6880,2071.46
  other v1: 1835,740 1915,740 1835,795 1915,795 800.73,2760.73
BG: HSEC8-120-01-S-RA-TR.2 Q12.3 R2.2 | length 5620.3
  Top Layer w6: HSEC8-120-01-S-RA-TR.2@4760.35,4522.99 4762.95,4520.39 4762.95,4467.95 4794.91,4436 7114,4436 7130,4420 7130,2195 7225,2100 7290,2100 7295.2,2094.8 R2.2@7295.2,2060 7295.2,2051.14 7278.51,2034.46 7244.46,2034.46 7215,2005 7215,1570 7260,1525 7300,1525 7313.9,1511.1 Q12.3@7313.9,1466.77
D1-1: B21.4 HSEC8-120-01-S-RA-TR.29 | length 1016
  Top Layer w6: v1(3930,4605) 3930,4670 v1(3945,4685) ; v1(3932.5,4402.5) 3965,4370 v1(3965,4295) ; v1(4315,4650) 4315,4606.14 HSEC8-120-01-S-RA-TR.29@4319.41,4601.73
  Bottom Layer w6: B21.4@3875.67,4182.8 3879.4,4186.53 3910.09,4186.53 3917.7,4194.14 3917.7,4217.04 3965,4264.33 v1(3965,4295) ; v1(3930,4605) 3930,4405 v1(3932.5,4402.5) v1@3935,4400 ; v1(3945,4685) 4280,4685 v1(4315,4650)
D1-2: B21.13 HSEC8-120-01-S-RA-TR.4 | length 1651.2
  Top Layer w6: v1(4352.66,3955) 4528.77,3955 4534.79,3961.01 v1(4538.57,3961.01) ; HSEC8-120-01-S-RA-TR.4@4728.86,4522.99 4728.86,4508.27 4730,4507.13 v1(4730,4465.47) v1@4730,4460
  Bottom Layer w6: B21.13@3644.33,4182.8 3692.71,4182.8 3941.29,3934.22 4027.71,3934.22 4029.91,3936.43 4334.08,3936.43 v1(4352.66,3955) ; v1(4538.57,3961.01) 4540.61,3961.01 4613,4033.4 4613,4278 4730,4395 v1@4730,4460
D2-1: B31.4 HSEC8-120-01-S-RA-TR.6 | length 1184.6
  Top Layer w6: v1(4352.66,3985) 4415,3985 4439.86,4009.86 4529.57,4009.86 4529.92,4010.2 v1(4557.27,4010.2) ; HSEC8-120-01-S-RA-TR.6@4697.36,4522.99 4697.36,4511.18 4699.96,4508.58 4700,4508.54 v1(4700,4465.47) v1@4700,4460
  Bottom Layer w6: B31.4@4039.33,4167.25 4049.38,4167.25 4052.13,4170 4075,4170 4260,3985 v1(4352.66,3985) ; v1(4557.27,4010.2) 4597,4049.93 4597,4284.63 4700,4387.63 v1(4700,4465.47)
D2-2: B31.13 HSEC8-120-01-S-RA-TR.10 | length 866.4
  Top Layer w6: v1(4380,4085) 4432.14,4032.86 v1(4514.92,4032.86) ; HSEC8-120-01-S-RA-TR.10@4634.37,4522.99 4634.37,4507.24 4635,4506.61 4635,4465 v1(4635,4465.47)
  Bottom Layer w6: B31.13@4265.25,4167.25 4322.75,4167.25 4380,4110 v1(4380,4085) ; v1(4514.92,4032.86) 4517.43,4035.37 4527.28,4035.37 4534.22,4042.31 4565,4073.08 4565,4305 4635,4375 v1@4635,4465
D3-1: B33.4 HSEC8-120-01-S-RA-TR.12 | length 1219.7
  Top Layer w6: v1(4544.5,4185) 4639.5,4090 v1(4690,4090) ; HSEC8-120-01-S-RA-TR.12@4602.87,4522.99 4602.87,4510.24 4605,4508.11 v1(4605,4465.47) ; v1(4885,4135) 4885,4065 v1(4910,4040)
  Bottom Layer w6: v1(4544.5,4185) 4544.5,4215.87 4548,4219.37 4548,4310.63 4605,4367.63 v1(4605,4465.47) ; v1(4690,4090) 4778.72,4090 4823.72,4135 v1(4885,4135) ; v1(4910,4040) 4985,4040 5132.8,4187.8 B33.4@5200.67,4187.8
D3-2: B33.13 HSEC8-120-01-S-RA-TR.16 | length 1050.8
  Top Layer w6: v1(4508,4234.52) 4511.79,4234.52 4523.23,4223.08 4527.67,4223.08 4545.26,4205.5 4645.5,4205.5 4665,4225 v1(4668,4225) ; HSEC8-120-01-S-RA-TR.16@4539.88,4522.99 4539.88,4506.8 4540.29,4506.39 v1(4540.29,4464.15)
  Bottom Layer w6: v1(4508,4234.52) 4508,4268.94 4516,4276.94 4516,4436.66 4540.29,4460.95 v1(4540.29,4464.15) ; v1(4668,4225) 4746.62,4225 4841.62,4320 4995,4320 5035,4280 5035,4208.51 5014.28,4187.8 B33.13@4969.33,4187.8
D4-1: B34.4 HSEC8-120-01-S-RA-TR.18 | length 1746.4
  Top Layer w6: v1(4503.5,4165) 4505,4165 4645,4025 v1(4695,4025) ; HSEC8-120-01-S-RA-TR.18@4508.39,4522.99 4508.39,4509.21 4510,4507.6 v1(4510,4465.47) ; v1(4805.5,3960) v1(4846.5,3960) ; v1(5170,3960) 5435,3960 v1(5440,3965)
  Bottom Layer w6: v1(4503.5,4165) 4505,4166.5 4505,4205 4485,4225 4485,4268.56 4495.34,4278.91 4495.34,4449.06 4510,4463.72 v1(4510,4465.47) ; v1(4695,4025) 4760,3960 v1(4805.5,3960) ; v1(4846.5,3960) v1(5170,3960) ; v1(5440,3965) 5510,4035 5510,4175 5522.8,4187.8 B34.4@5610.67,4187.8
D4-2: B34.13 HSEC8-120-01-S-RA-TR.22 | length 1848.6
  Top Layer w6: HSEC8-120-01-S-RA-TR.22@4445.39,4522.99 4445,4522.6 4445,4505.59 4446.17,4504.42 v1(4446.17,4460) ; v1(4500,3902.26) 4519.26,3902.26 4522,3905 4525,3905 v1(4597.45,3905.01)
  Bottom Layer w6: v1(4446.17,4460) 4448.79,4460 4457.66,4451.13 4458.76,4451.13 4463,4446.89 4463,4291.82 4453,4281.82 4453,4211.74 4459.92,4204.82 4459.92,3935.6 4486.52,3909 4489.47,3909 4496.21,3902.26 v1(4500,3902.26) ; v1(4597.45,3905.01) 4674.99,3905.01 4735.31,3844.69 5233.68,3844.69 5320,3931.01 5320,4175 5332.8,4187.8 B34.13@5379.33,4187.8
D5-1: B35.4 HSEC8-120-01-S-RA-TR.24 | length 2421.9
  Top Layer w6: HSEC8-120-01-S-RA-TR.24@4413.9,4522.99 4416.49,4520.4 v1(4416.49,4464.41) ; v1(4495,3865) v1(4585,3865) ; v1(5690,4041.01) 5777.02,4041.01 5881.01,4145 v1(5930,4145)
  Bottom Layer w6: v1(4416.49,4464.41) 4416.49,4460.63 4422,4455.12 4422,4450.47 4447,4425.47 4447,4298.45 4437,4288.45 4437,4203.63 4443.92,4196.71 4443.92,3916.08 v1(4495,3865) ; v1(4585,3865) 4692.37,3865 4728.69,3828.69 5326.06,3828.69 5361.87,3864.5 5513.49,3864.5 v1(5690,4041.01) ; v1(5930,4145) 5929.5,4145.5 5929.5,4183.49 5941.51,4195.5 6022.96,4195.5 B35.4@6025.67,4192.8
D5-2: B35.13 HSEC8-120-01-S-RA-TR.28 | length 2308.3
  Top Layer w6: HSEC8-120-01-S-RA-TR.28@4350.91,4522.99 4350.91,4510.04 4356.51,4504.43 v1(4356.51,4464.16) ; v1(4495,3815) 4576.21,3815 4581.21,3810 v1(4585,3810)
  Bottom Layer w6: v1(4356.51,4464.16) 4356.51,4405.23 4352.93,4401.65 4352.93,4346.51 4421,4278.45 4421,4197.01 4427.17,4190.83 4427.17,3910.2 4448,3889.37 4448,3858.21 4491.21,3815 v1(4495,3815) ; v1(4585,3810) 4747.37,3810 4748.87,3808.5 5220.12,3808.5 5224.31,3812.69 5332.69,3812.69 5351.84,3831.84 5529.37,3831.84 5711.62,4014.09 5711.62,4140.77 5759.91,4189.06 5790.6,4189.06 B35.13@5794.33,4192.8
D6-1: B21.5 HSEC8-120-01-S-RA-TR.32 | length 656.4
  Top Layer w6: HSEC8-120-01-S-RA-TR.32@4287.91,4522.99 4290.51,4520.39 v1(4290.51,4465.51)
  Bottom Layer w6: B21.5@3875.67,4157.2 3879.4,4160.94 3910.09,4160.94 3933.7,4184.55 3933.7,4210.41 3981,4257.71 3981,4271.29 4004.91,4295.2 4175.2,4295.2 4290.51,4410.51 v1(4290.51,4465.51)
D6-2: B21.12 HSEC8-120-01-S-RA-TR.38 | length 1016.4
  Top Layer w6: v1(4180,4335) 4195,4350 v1(4195,4395) ; HSEC8-120-01-S-RA-TR.38@4193.43,4522.99 4193.43,4509.13 4195,4507.56 v1(4195,4465.47)
  Bottom Layer w6: B21.12@3644.33,4157.2 3640.6,4160.94 3599.06,4160.94 3565,4195 3565,4286.49 3613.51,4335 v1(4180,4335) ; v1(4195,4395) v1(4195,4465.47)
D7-1: B31.5 HSEC8-120-01-S-RA-TR.40 | length 398.2
  Top Layer w6: v1(4115,4240) 4115,4350 v1(4160,4395) ; HSEC8-120-01-S-RA-TR.40@4161.93,4522.99 4164.53,4520.39 v1(4164.53,4465.47)
  Bottom Layer w6: B31.5@4039.33,4196.57 4041.61,4198.85 4073.85,4198.85 v1(4115,4240) ; v1(4160,4395) 4164.53,4399.53 v1(4164.53,4465.47)
D7-2: B31.12 HSEC8-120-01-S-RA-TR.3 | length 901.6
  Top Layer w6: HSEC8-120-01-S-RA-TR.3@4728.86,4601.73 4729.31,4602.19 v1(4729.31,4641.72)
  Bottom Layer w6: B31.12@4249.33,4196.57 4253.06,4200.31 4270.67,4200.31 4236.25,4200.31 4228.63,4207.92 4228.63,4304.32 4333.51,4409.2 4333.51,4505.6 4367.91,4540 4555,4540 4580,4565 4618.11,4565 4694.83,4641.72 v1(4729.31,4641.72)
D8-1: B33.5 HSEC8-120-01-S-RA-TR.5 | length 1030.5
  Top Layer w6: HSEC8-120-01-S-RA-TR.5@4697.36,4601.73 4699.96,4604.33 4699.96,4649.96 v1(4715.5,4665.5) ; v1(4795,4640) 4967.56,4640 4977.56,4630 v1(4980,4630)
  Bottom Layer w6: v1(4715.5,4665.5) 4717,4667 4732,4667 4735,4670 4765,4670 v1(4795,4640) ; v1(4980,4630) 5295,4315 5295,4190 5270.94,4165.94 5226.7,4165.94 5222.97,4162.2 B33.5@5200.67,4162.2
D8-2: B33.12 HSEC8-120-01-S-RA-TR.9 | length 1021.7
  Top Layer w6: HSEC8-120-01-S-RA-TR.9@4634.37,4601.73 4635,4602.36 v1(4635,4650)
  Bottom Layer w6: v1(4635,4650) 4635,4685 4670,4720 4860,4720 4925.56,4654.44 4925.56,4488.69 5055,4359.25 5055,4205.89 5011.32,4162.2 B33.12@4969.33,4162.2
D9-1: B34.5 HSEC8-120-01-S-RA-TR.11 | length 1605.9
  Top Layer w6: HSEC8-120-01-S-RA-TR.11@4602.87,4601.73 4605,4603.86 v1(4605,4650) ; v1(5405,4545) 5485,4545 v1(5490,4540)
  Bottom Layer w6: v1(4605,4650) 4605,4677.63 4663.37,4736 5139,4736 5330,4545 v1(5405,4545) ; v1(5490,4540) 5694,4336 5694,4174 5682.2,4162.2 B34.5@5610.67,4162.2
D9-2: B34.12 HSEC8-120-01-S-RA-TR.15 | length 1555.9
  Top Layer w6: HSEC8-120-01-S-RA-TR.15@4539.88,4601.73 4540,4601.85 v1(4540,4645)
  Bottom Layer w6: v1(4540,4645) 4540,4692.37 4600.63,4753 4809.7,4753 4810.7,4752 5259.62,4752 5455,4556.62 5455,4207.19 5413.75,4165.94 5383.06,4165.94 B34.12@5379.33,4162.2
D10-1: B35.5 HSEC8-120-01-S-RA-TR.17 | length 2066.1
  Top Layer w6: HSEC8-120-01-S-RA-TR.17@4508.39,4601.73 4510,4603.35 v1(4510,4650) ; v1(5822.5,4300) 5824.94,4300 5834.97,4289.96 5835.04,4289.96 5910.96,4214.04 5931.15,4193.85 v1(5950,4175)
  Bottom Layer w6: v1(4510,4650) 4510,4685 4594,4769 4816.33,4769 4817.33,4768 5665.93,4768 5822.5,4611.43 v1(5822.5,4300) ; v1(5950,4175) 5952.44,4175 5960.23,4167.2 B35.5@6025.67,4167.2
D10-2: B35.12 HSEC8-120-01-S-RA-TR.21 | length 2144.3
  Top Layer w6: v1(4440,4656.89) 4441.91,4654.98 4441.91,4640.18 4445,4637.09 4445,4602.13 HSEC8-120-01-S-RA-TR.21@4445.39,4601.73
  Bottom Layer w6: v1(4440,4656.89) 4440,4762.53 4473.83,4796.35 4501.44,4796.35 4512.79,4785 4822.95,4785 4823.95,4784 5679.43,4784 5843,4620.43 5843,4185.19 5828.75,4170.94 5798.06,4170.94 B35.12@5794.33,4167.2
D11-1: B35.6 HSEC8-120-01-S-RA-TR.23 | length 2492.3
  Top Layer w6: v1(4411.08,4648.92) 4411.08,4604.55 HSEC8-120-01-S-RA-TR.23@4413.9,4601.73 ; v1(5863.5,4340) 5865.76,4340 5876.3,4329.46 5880.54,4329.46 5885,4325 6040,4325 v1(6070,4295)
  Bottom Layer w6: v1(4411.08,4648.92) 4411.08,4750.58 4470.79,4810.29 4498.31,4810.29 4558.02,4870 5616.06,4870 5868,4618.06 5868,4346.94 5863.5,4342.44 v1(5863.5,4340) ; B35.6@6025.67,4141.61 6029.4,4145.35 6080.35,4145.35 6100,4165 6100,4265 v1(6070,4295)
D11-2: B35.11 HSEC8-120-01-S-RA-TR.27 | length 2408.1
  Top Layer w6: v1(4350,4650) 4350,4602.64 HSEC8-120-01-S-RA-TR.27@4350.91,4601.73
  Bottom Layer w6: v1(4350,4650) 4350,4794.46 4377.54,4822 4392.46,4822 4417.46,4847 4518.05,4847 4553.05,4882 5626.69,4882 5884,4624.69 5884,4331.51 5881.5,4329.01 5881.5,4198.1 5828.75,4145.35 5798.06,4145.35 B35.11@5794.33,4141.61
GND: 3.3V_REG.4 3.3V_REG.9 5V_REG.4 5V_REG.9 -5V_REG.4 -5V_REG.12 -5V_REG.13 B21.3 B21.6 B21.7 B21.10 B21.11 B21.15 B22.3 B22.6 B22.7 B22.10 B22.11 B22.15 B31.3 B31.6 B31.7 B31.10 B31.11 B31.15 B32.3 B32.7 B32.9 B32.10 B32.11 B32.12 B32.13 B32.15 B33.3 B33.6 B33.7 B33.10 B33.11 B33.15 B34.3 B34.6 B34.7 B34.10 B34.11 B34.15 B35.3 B35.7 B35.10 B35.15 B36.3 B36.6 B36.7 B36.10 B36.11 B36.15 B39.7 BG.2 BG.3 BG.4 BG.5 c2.1 c3.1 c4.1 c5.1 c6.1 C8.2 C10.2 C12.2 C14.2 C16.2 C18.2 C21.2 C22.2 C25.2 C26.2 C27.2 C28.1 C42.2 C43.2 C44.2 Ccp1.1 CH1_OUT.2 CH1_OUT.3 CH1_OUT.4 CH1_OUT.5 CH2_OUT.2 CH2_OUT.3 CH2_OUT.4 CH2_OUT.5 CH3_OUT.2 CH3_OUT.3 CH3_OUT.4 CH3_OUT.5 CH4_OUT.2 CH4_OUT.3 CH4_OUT.4 CH4_OUT.5 CH5_OUT.2 CH5_OUT.3 CH5_OUT.4 CH5_OUT.5 CH6_OUT.2 CH6_OUT.3 CH6_OUT.4 CH6_OUT.5 CH7_OUT.2 CH7_OUT.3 CH7_OUT.4 CH7_OUT.5 CH8_OUT.2 CH8_OUT.3 CH8_OUT.4 CH8_OUT.5 CH9_OUT.2 CH9_OUT.3 CH9_OUT.4 CH9_OUT.5 CH10_OUT.2 CH10_OUT.3 CH10_OUT.4 CH10_OUT.5 Cvin1.1 HSEC8-120-01-S-RA-TR.35 HSEC8-120-01-S-RA-TR.37 HSEC8-120-01-S-RA-TR.39 I_BG.2 I_BG.3 I_BG.4 I_BG.5 I_SOL_G.2 I_SOL_G.3 I_SOL_G.4 I_SOL_G.5 I_TG4.2 I_TG4.3 I_TG4.4 I_TG4.5 I_TG6.2 I_TG6.3 I_TG6.4 I_TG6.5 J1.2 J1.3 JTAG.5 pad. pad.3 R4.2 R43.1 R48.1 R53.1 R58.1 R63.1 R68.1 R76.1 R78.1 R86.1 R88.1 S_IN1.2 S_IN1.3 S_IN1.4 S_IN1.5 S_IN2.2 S_IN2.3 S_IN2.4 S_IN2.5 S_IN3.2 S_IN3.3 S_IN3.4 S_IN3.5 S_IN4.2 S_IN4.3 S_IN4.4 S_IN4.5 S_IN5.2 S_IN5.3 S_IN5.4 S_IN5.5 SOL_G.2 SOL_G.3 SOL_G.4 SOL_G.5 TG1.2 TG1.3 TG1.4 TG1.5 TG2.2 TG2.3 TG2.4 TG2.5 VD1.2 VD1.3 VD1.4 VD1.5 VD2.2 VD2.3 VD2.4 VD2.5 VD3.2 VD3.3 VD3.4 VD3.5 VD4.2 VD4.3 VD4.4 VD4.5 VD5.2 VD5.3 VD5.4 VD5.5 VD6.2 VD6.3 VD6.4 VD6.5 VD7.2 VD7.3 VD7.4 VD7.5 VD8.2 VD8.3 VD8.4 VD8.5 VD9.2 VD9.3 VD9.4 VD9.5 VD10.2 VD10.3 VD10.4 VD10.5 | length 1246.2
  Top Layer w8: 3.3V_REG.4@1030,696.77 3.3V_REG.4@1030,714 ; R4.2@1695,805 R4.2@1695.2,805.2 ; -5V_REG.13@1770,580 -5V_REG.13@1770,547.5 1779.84,557.34 -5V_REG.4@1811.34,557.34 ; C44.2@1854.55,4312.81 C44.2@1856.74,4315
  Top Layer w10: B39.7@3199.94,4453.98 3242.01,4411.91 3248.09,4411.91 v1(3250,4410)
  Bottom Layer w6: C8.2@1085,3150 C8.2@1085.88,3150.88
  Bottom Layer w8: VD6.4@706,1469.29 VD6.4@724.29,1469.29 ; VD7.4@2230,1474.29 VD7.4@2230.67,1473.62 ; CH8_OUT.4@4330.05,1473.34 CH8_OUT.4@4331,1474.29 ; CH9_OUT.2@5575.5,1674.79 CH9_OUT.2@5576,1674.29 ; CH4_OUT.4@5745.5,2779.5 CH4_OUT.4@5746,2780 ; CH9_OUT.5@5775.5,1674.79 CH9_OUT.5@5776,1674.29 ; C26.2@6758.14,1887.72 C26.2@6760,1889.58 ; CH10_OUT.4@7090,1485 CH10_OUT.4@7095,1480
  Bottom Layer w10: CH7_OUT.2@2630.71,1674.29 CH7_OUT.2@2631,1674.29 ; CH7_OUT.3@2631,1456 CH7_OUT.3@2631,1474.29 ; v1(2690,830) 2708.39,811.61 B36.3@2799.33,811.61 ; v1(2745,980) 2745,935 ; B36.6@2799.33,888.39 2797.6,890.12 2759.88,890.12 2745,905 2745,935 ; B36.7@2799.33,913.98 2797.6,915.71 2764.08,915.71 2755.3,924.5 2755.3,924.7 2745,935 ; CH7_OUT.4@2831,1466 CH7_OUT.4@2831,1474.29 ; B36.15@3030.67,786.02 3068.98,786.02 v1(3100,755) ; B36.11@3030.67,888.39 3083.39,888.39 3100.86,905.86 3100.86,935.86 ; B36.10@3030.67,913.98 3078.98,913.98 3100.86,935.86 ; v1(3105,980) 3105,940 3100.86,935.86 ; v1(3620,895) 3621.02,893.98 B22.15@3669.87,893.98 ; B22.10@3669.87,766.02 3616.02,766.02 3610,772.05 v1(3610,795) 3613.39,791.61 B22.11@3669.87,791.61 ; VD3.4@3700.5,2779.5 VD3.4@3701,2780 ; VD3.5@3701,2980 3701,2996 VD3.5@3702.62,2996 ; B22.7@3901.21,766.02 3905.07,769.88 3939.88,769.88 v1(3960,790) 3958.65,790 3957.03,791.61 B22.6@3901.21,791.61 ; B22.3@3901.21,868.39 3943.39,868.39 v1(3945,870)
  other v1: 1115,90 1310,90 1540,90 6945,100 2040,110 7495,110 5235,140 1810,150 405,185 510,185 695,185 600,190 795,190 6315,190 2190,210 1540,215 2035,245 1950,290 2190,370 1755,440 1805,440 4660,465 2190,510 1275,540 1965,575 955,580 1275,635 5205,640 955,685 2235,780 2110,790 4675,865 3825,870 4985,900 5080,900 1055,980 7510,980 1490,990 1965,995 6925,995 6280,1020 645,1190 410,1195 4235,1260 1495,1275 6820,1275 7020,1280 5550,1322 5715,1325 4370,1330 4140,1765 6763.9,1899 3940,2070 3975,2245 3260,2270 360,2375 845,2385 1850,2385 2380,2390 5225,2395 5395,2400 6130,2600 6800,2630 4325.96,2646.57 4125,2660 5520,3085 5440,3335 4910,3435 5115,3435 6700,3435 5435,3650 5585,3650 3685,3875 5755,3980 4105,4010 6955,4010 5155,4015 5040,4035 4210,4110 5270,4110 3715,4120 3580,4125 5440,4125 450,4145 840,4145 1175,4145 5470,4160 3990,4180 4210,4180 3345,4185 4365,4185 5080,4190 4750,4200 3740,4205 4145,4205 4345,4210 5120,4225 6605,4280 1920,4295 6875,4305 5735,4310 1645,4330 1920,4330 4890,4360 4110,4475 5255,4510 4100,4600 435,4625 1015,4630 5085,4635 1220,4800 6475,4805 6910,4805 780,4810 3780,4820 3606.18,4836.38
Net3.3V_REG_1: 3.3V_REG.1 3.3V_REG.2 3.3V_REG.3 B39.6 C42.1 C43.1 JTAG.12 R37.1 | length 8136.9
  Top Layer w10: 2145,4605 2760,4605 2800,4565 3061.08,4565 B39.6@3186.02,4440.06
  Top Layer w20: 1080,730 1080,750 815,1015 195,1015 145,1065 145,4130 379.65,4364.65 1547.11,4364.65 ; JTAG.12@1685,4665 1685,4502.54 ; C43.1@1788.8,4231.72 1814.9,4205.61 1955.33,4205.61 R37.1@1971.46,4221.73 ; C43.1@1788.8,4235.61 1785.61,4238.8 C43.1@1771.04,4238.8 C42.1@1687.53,4238.8 1672.96,4238.8 1547.11,4364.65 ; R37.1@1971.46,4230.51 1981.18,4240.24 R37.1@1990,4240.2 ; 2145,4605 2097.48,4605 1995.01,4502.54 1685,4502.54 ; 1547.11,4364.65 1685,4502.54
Net3.3V_REG_5: 3.3V_REG.5 3.3V_REG.7 3.3V_REG.8 5V_REG.5 5V_REG.7 5V_REG.8 -5V_REG.3 -5V_REG.8 c2.2 c6.2 Cvin1.2 J1.1 J1.A1 Rpu1.1 | length 2792.7
  Top Layer w6: 1166.49,525 1170,525 ; -5V_REG.3@1811.34,537.66 1812.12,538.44 1831.66,538.44
  Top Layer w10: 1029.9,450.43 ccw(c998.95,452.86) 1030,452.86 ; 3.3V_REG.5@1030,483.23 1037.8,491.02 1037.8,519.14 1043.65,525 1057.74,525 1060.99,528.25 1163.24,528.25 1166.49,525 ; 3.3V_REG.7@1130,483.23 1131.77,485 1145,485 ; 1170,525 1175,520 1175,488.23 3.3V_REG.8@1178.23,485 ; 5V_REG.5@1350,471.46 1356.34,477.8 1356.34,509.14 1363.68,516.48 1436.32,516.48 1443.66,509.14 1443.66,477.8 5V_REG.7@1450,471.46 ; 1655,625 1702.97,577.03 -5V_REG.8@1728.66,577.03
  Top Layer w12: c6.2@1136.5,425 1320.77,425 1350,454.23 5V_REG.5@1350,471.46 ; 1832.71,537.39 1832.98,537.66 1835.64,535 Rpu1.1@1905,535
  Top Layer w13: c6.2@1130,430 3.3V_REG.7@1130,483.23
  Top Layer w15: c2.2@1487.01,407.99 1514.19,380.81
  Top Layer w16: 1514.19,380.81 1930.81,380.81 ; 1580,625 1655,625
  Top Layer w20: J1.A1@684.06,820.91 684.06,800.12 723.27,760.91 804.09,760.91 880,685 880,515 911.77,483.23 3.3V_REG.5@1030,483.23 ; 1145,485 3.3V_REG.8@1178.23,485 ; 5V_REG.7@1450,471.46 5V_REG.8@1500,471.46 1497.2,468.66 1497.2,418.19 c2.2@1494.02,415 ; c2.2@1480,415 c2.2@1494.02,415 ; 1580,625 1560,605 1560,450 1525,415 c2.2@1494.02,415 ; Rpu1.1@1905,535 1910,530 1955,530 1970,515 1970,420 1930.81,380.81 1998.28,380.81 2010,392.53 2010,422.8 2013.19,425.98 Cvin1.2@2020,425.98
Net3.3V_REG_6: 3.3V_REG.6 c5.2 | length 64.3
  Top Layer w13: c5.2@1070,425 1073.31,425 1080,431.69 3.3V_REG.6@1080,483.23
Net5V_REG_6: 5V_REG.6 c4.2 | length 59.4
  Top Layer w8: 5V_REG.6@1400,471.46 5V_REG.6@1400.95,470.51
  Top Layer w12: c4.2@1400.95,412.4 5V_REG.6@1400.95,470.51
Net-5V_REG_1: -5V_REG.1 Rpu1.2 | length 109.4
  Top Layer w6: -5V_REG.1@1811.34,498.29 1839.2,498.29
  Top Layer w12: 1839.2,498.29 1863.6,473.88 1891.31,473.88 Rpu1.2@1905,460.2
Net-5V_REG_5: -5V_REG.5 Ccp1.2 | length 224.6
  Top Layer w6: -5V_REG.5@1811.34,577.03 1832.03,577.03 1832.3,577.3 1832.71,577.3
  Top Layer w12: 1832.71,577.3 1832.98,577.03 1840.95,585 1911.25,585 1940.39,614.15 2019.15,614.15 Ccp1.2@2020,615
Net-5V_REG_7: -5V_REG.7 R4.1 R5.1 | length 259.1
  Top Layer w6: 1711.15,600.53 1712.06,599.62 1725.76,599.62 -5V_REG.7@1728.66,596.71 ; R5.1@1718.68,643.68 R5.1@1735,660
  Top Layer w12: R4.1@1695,730.2 1693.69,730.2 1680,716.51 1680,690 ; 1711.15,600.53 1680,631.68 1680,690 ; R5.1@1735,660 1723.85,671.15 1698.85,671.15 1680,690
Net-5V_REG_9: -5V_REG.9 C1.1 | length 121.3
  Top Layer w6: 1686.46,557.01 1686.51,557.07 1728.39,557.07 -5V_REG.9@1728.66,557.34
  Top Layer w12: C1.1@1624.66,590.46 1625,590.46 1632.19,583.27 1632.19,577.81 1665.77,577.81 1670.51,573.07 1670.51,572.96 1686.46,557.01
Net-5V_REG_10: -5V_REG.10 C1.2 | length 114
  Top Layer w6: 1687.66,535.01 1690.3,537.66 -5V_REG.10@1728.66,537.66
  Top Layer w12: C1.2@1624.66,516.44 1626.1,515 1667.65,515 1687.66,535.01
Net-5V_REG_11: -5V_REG.11 C28.2 | length 83.9
  Top Layer w12: C28.2@1665,484.02 1679.57,484.02 1695,499.45 1695,510 1702.88,517.88 1728.57,517.88 -5V_REG.11@1728.66,517.97
NetB2_1: B2.1 R39.1 R41.2 | length 1325.1
  Bottom Layer w8: R39.1@285.2,3120 230,3064.8 230,2926.37 315.66,2840.71 315.66,2740.71 321.88,2734.49 321.88,2703.12 440,2585 765,2585 805,2625 805,2685 815,2695 R41.2@875.95,2695 890.95,2710 967.72,2710 1001.95,2744.23 B2.1@1001.95,2761.46
NetB2_2: B2.2 R41.1 R43.2 | length 489.9
  Bottom Layer w8: R41.1@875.95,2620.2 959.8,2620.2 R43.2@965,2615 965,2657.27 1055,2747.27 1055,2800 1025,2830 965,2830 951.95,2816.95 B2.2@951.95,2761.46
NetB2_3: B2.3 B2.5 VD1.1 | length 582.6
  Bottom Layer w8: VD1.1@585,2880 705,2880 ; B2.5@851.95,2975 800,2975 705,2880 ; B2.3@901.95,2761.46 901.95,2813.05 835,2880 705,2880
NetB2_6: B2.6 B21.8 C7.1 R39.2 R40.1 | length 4653.8
  Top Layer w6: v1(3295,4025) 3296,4024 3516,4024 v1(3517,4023) ; v1(3805,4025) 3868.06,4025 3872.56,4029.5 v1(3875,4029.5)
  Bottom Layer w6: R39.2@360,3120 361,3119 361,3082.46 403.46,3040 854.17,3040 ; B2.6@901.95,2992.22 854.17,3040 ; v1(3295,4025) 1440,4025 810,3395 810,3084.17 854.17,3040 ; v1(3517,4023) 3518,4024 3804,4024 v1(3805,4025) ; v1(3875,4029.5) 3875,4079.76 B21.8@3875.67,4080.43
  Bottom Layer w8: B2.6@901.95,2992.22 901.95,3151.95 910,3160 945,3160 955,3150 1015.98,3150 C7.1@1017.6,3151.61
NetB2_7: B2.7 C7.2 R40.2 R42.1 | length 430.1
  Bottom Layer w8: C7.2@1017.6,3077.6 1015.2,3075.2 955,3075.2 945,3085.2 945,2999.17 951.95,2992.22 1008.52,3048.8 1124.74,3048.8 1161.14,3085.2 R42.1@1170,3085.2
NetB4_1: B4.1 R44.1 R46.2 | length 1605.1
  Bottom Layer w6: R44.1@1785,3240 1785,3231.14 1856.31,3159.83 1856.31,3064.83 1879.59,3041.55 1879.59,2864.59 1845,2830 1845,2730 1871.48,2703.52 1871.48,2593.52 1925,2540 2235,2540 2305,2610 2305,2690 2310,2695 R46.2@2355,2695
  Bottom Layer w10: R46.2@2355,2695 2480,2695 2510,2725 B4.1@2510,2835
NetB4_2: B4.2 R46.1 R48.2 | length 518.2
  Bottom Layer w10: R46.1@2355,2620.2 2440.39,2620.2 R48.2@2445.2,2625 2445.2,2633.86 2459.88,2648.54 2468.74,2648.54 2555,2734.8 2555,2874.16 2549.14,2880.02 2487.8,2880.02 2460,2852.22 B4.2@2460,2835
NetB4_3: B4.3 B4.5 VD2.1 | length 686.8
  Bottom Layer w6: B4.5@2360,3048.54 2218.54,3048.54 2130,2960 VD2.1@2130,2880 2142.13,2892.13 2406.49,2892.13 2410,2888.62 B4.3@2410,2835
NetB4_6: B4.6 B21.9 C9.1 R44.2 R45.1 | length 3070.8
  Top Layer w6: v1(3480,4080) 3570,4080 v1(3570.43,4080.43)
  Bottom Layer w6: R44.2@1859.8,3240 1859.8,3231.14 1876.49,3214.46 1939.87,3214.46 1994.33,3160 2240,3160 2300,3100 2375.77,3100 B4.6@2410,3065.77 ; C9.1@2305,3165.98 2310,3160.98 2325,3160.98 2335.19,3171.17 2378.83,3171.17 2390.37,3159.63 2399.23,3159.63 2410.54,3148.31 2410.54,3125.05 2428.28,3107.31 2428.28,3084.05 B4.6@2410,3065.77 ; B4.6@2410,3048.54 B4.6@2410,3065.77 ; v1(3480,4080) 3179,3779 2461.37,3779 2360,3677.63 2360,3350 2268.24,3258.24 2268.24,3156.76 2310,3115 2390,3115 2410,3095 B4.6@2410,3065.77 ; v1@3570,4080 v1(3570.43,4080.43) B21.9@3644.33,4080.43